# Altium PCB FPGA_Rack_v1_0.PcbDoc (part 1 of 5)
Units mil, origin at the board's own origin, x right, y up, seen from the top; angles counter-clockwise.
Board outline 6299.21 x 3937.01 mil, 8 copper layers (Top Layer, Top, Internal Plane 2, Vcc 3.3V, Internal Plane 1, Gnd, Mid-Layer 1, SIG1, Mid-Layer 2, SIG3, Mid-Layer 3, SIG2, Mid-Layer 4, SIG4, Bottom Layer, Bottom), stack 74.2 mil thick; 215 components, 379 nets, 1713 pads, 1076 vias.
Unrouted connection lines stored in the file: 1.
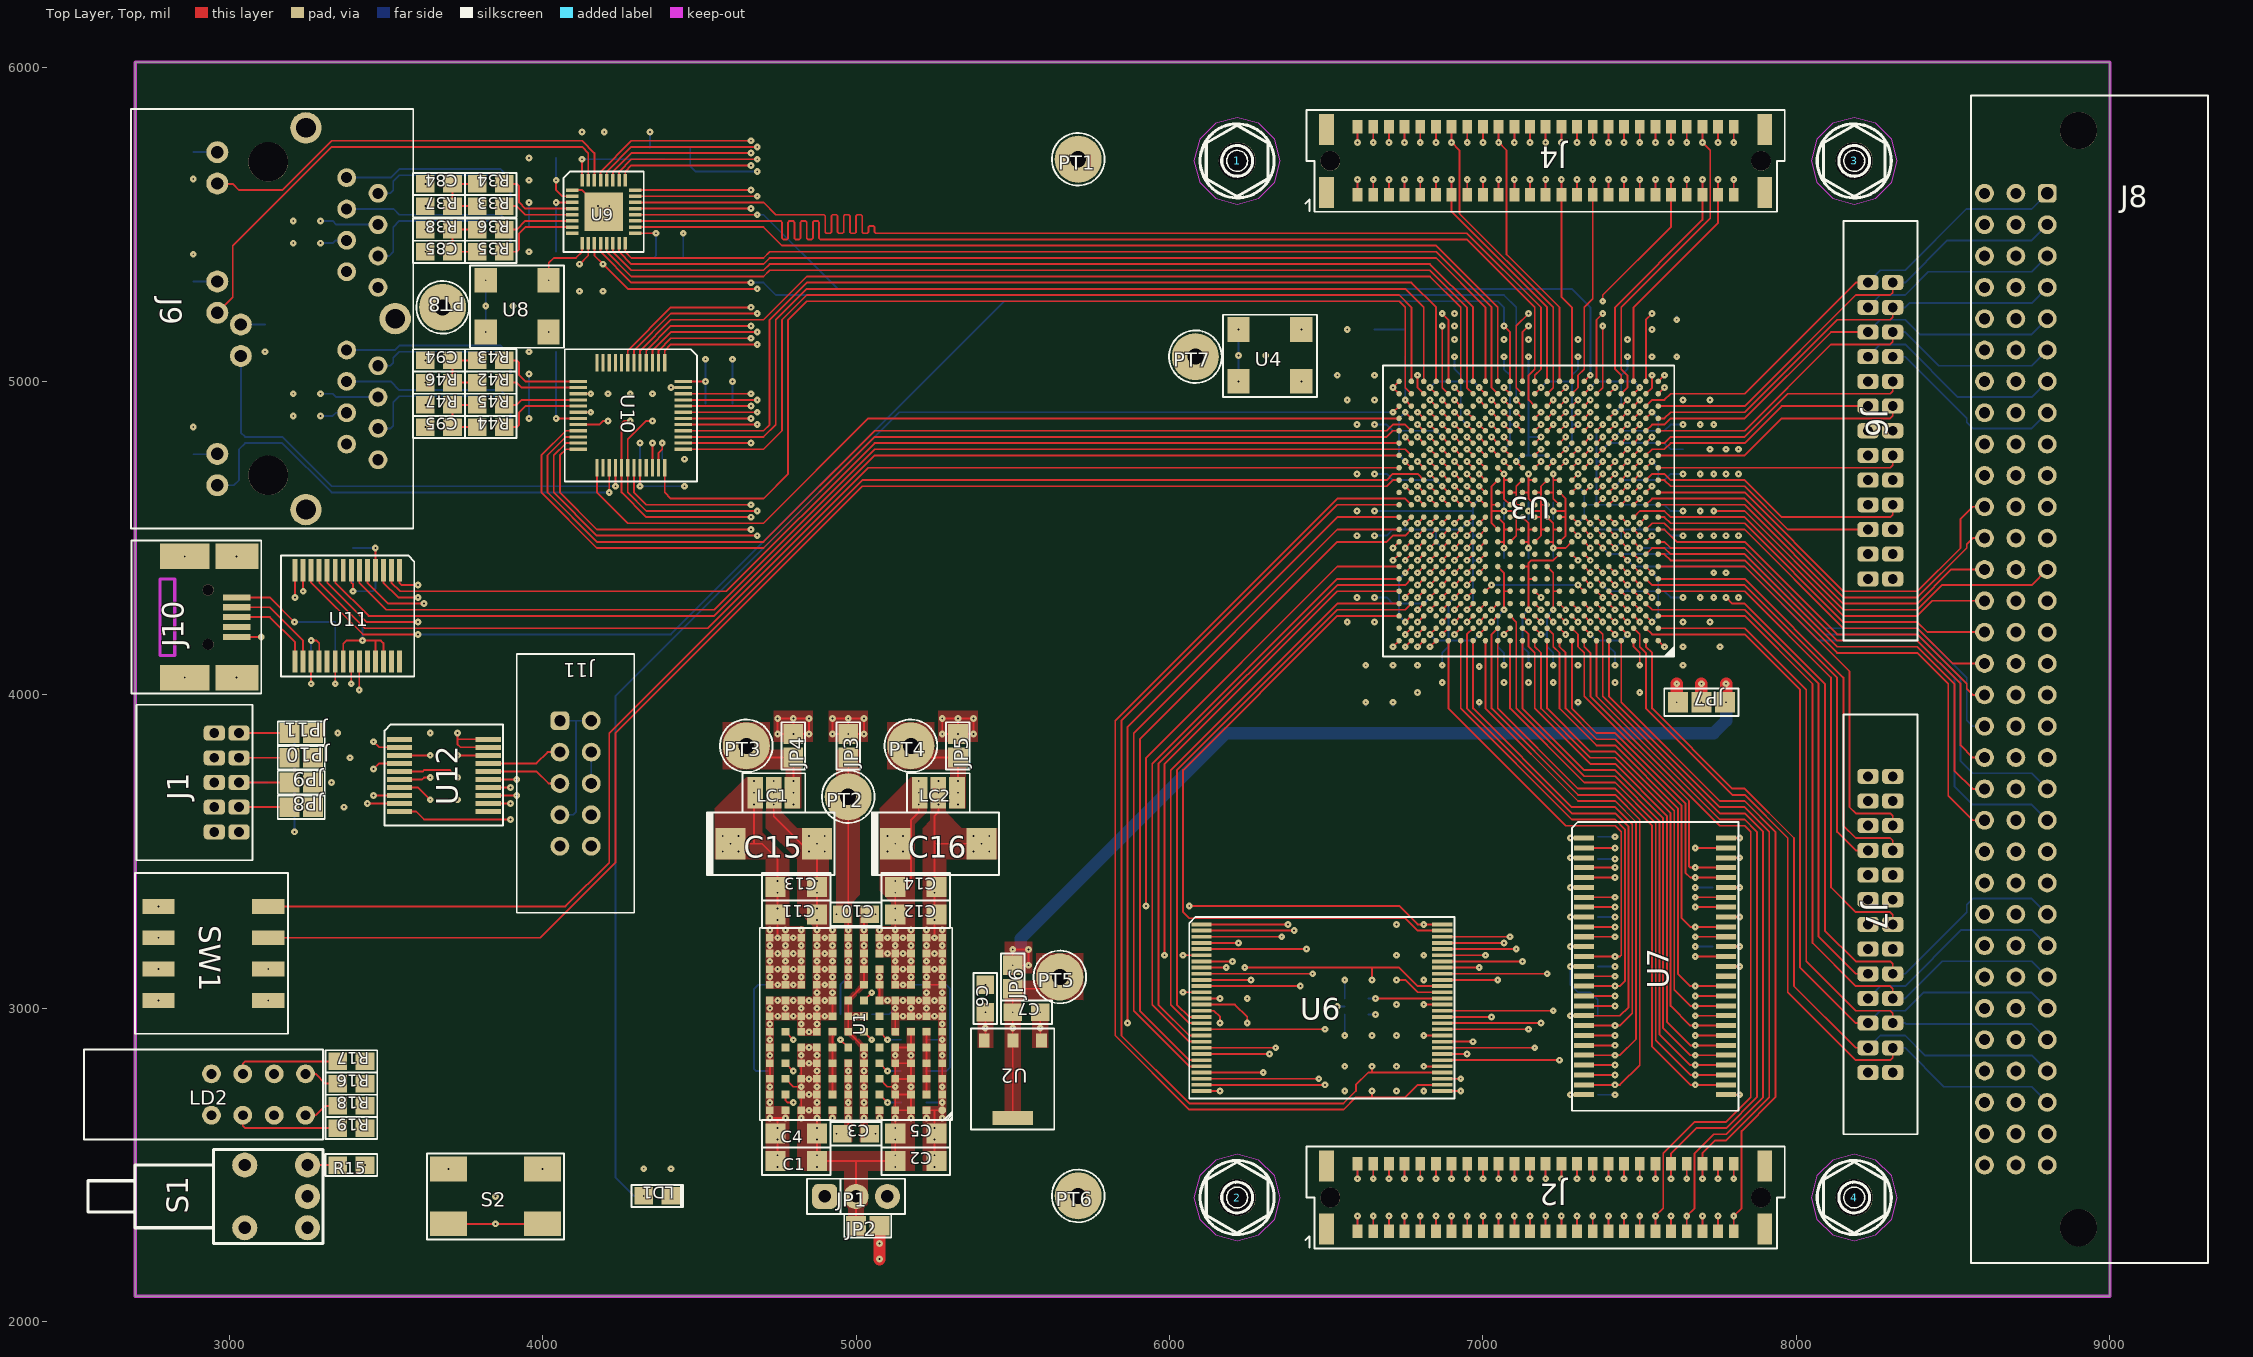
[diagram p0: Top Layer, Top view]
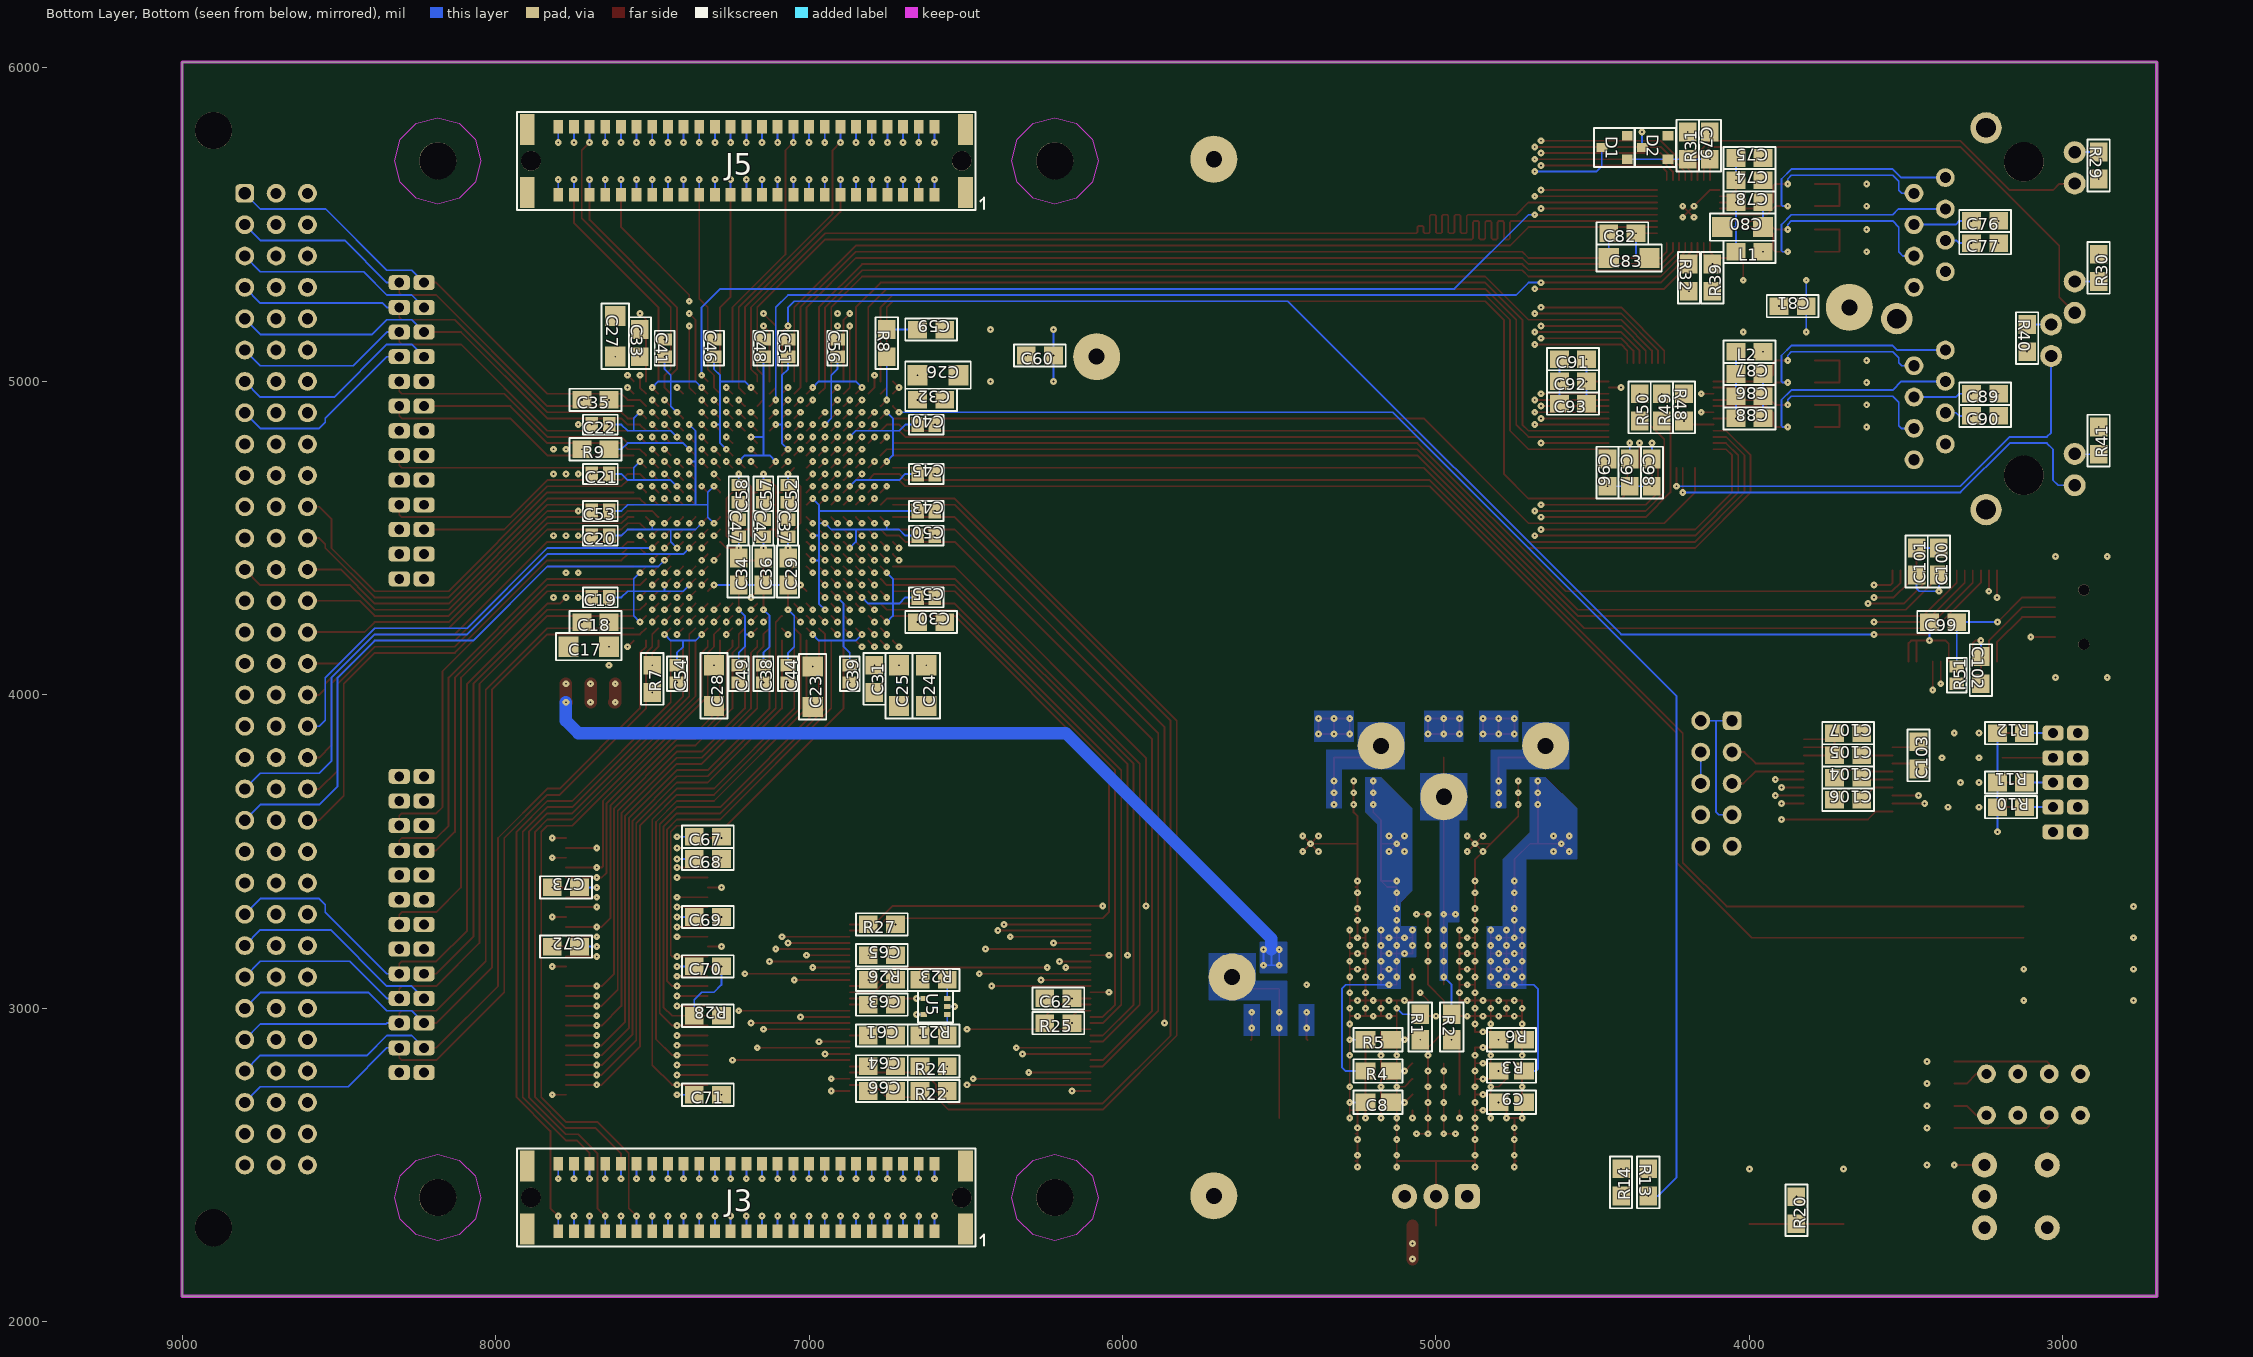
[diagram p1: Bottom Layer, Bottom view, seen from below]
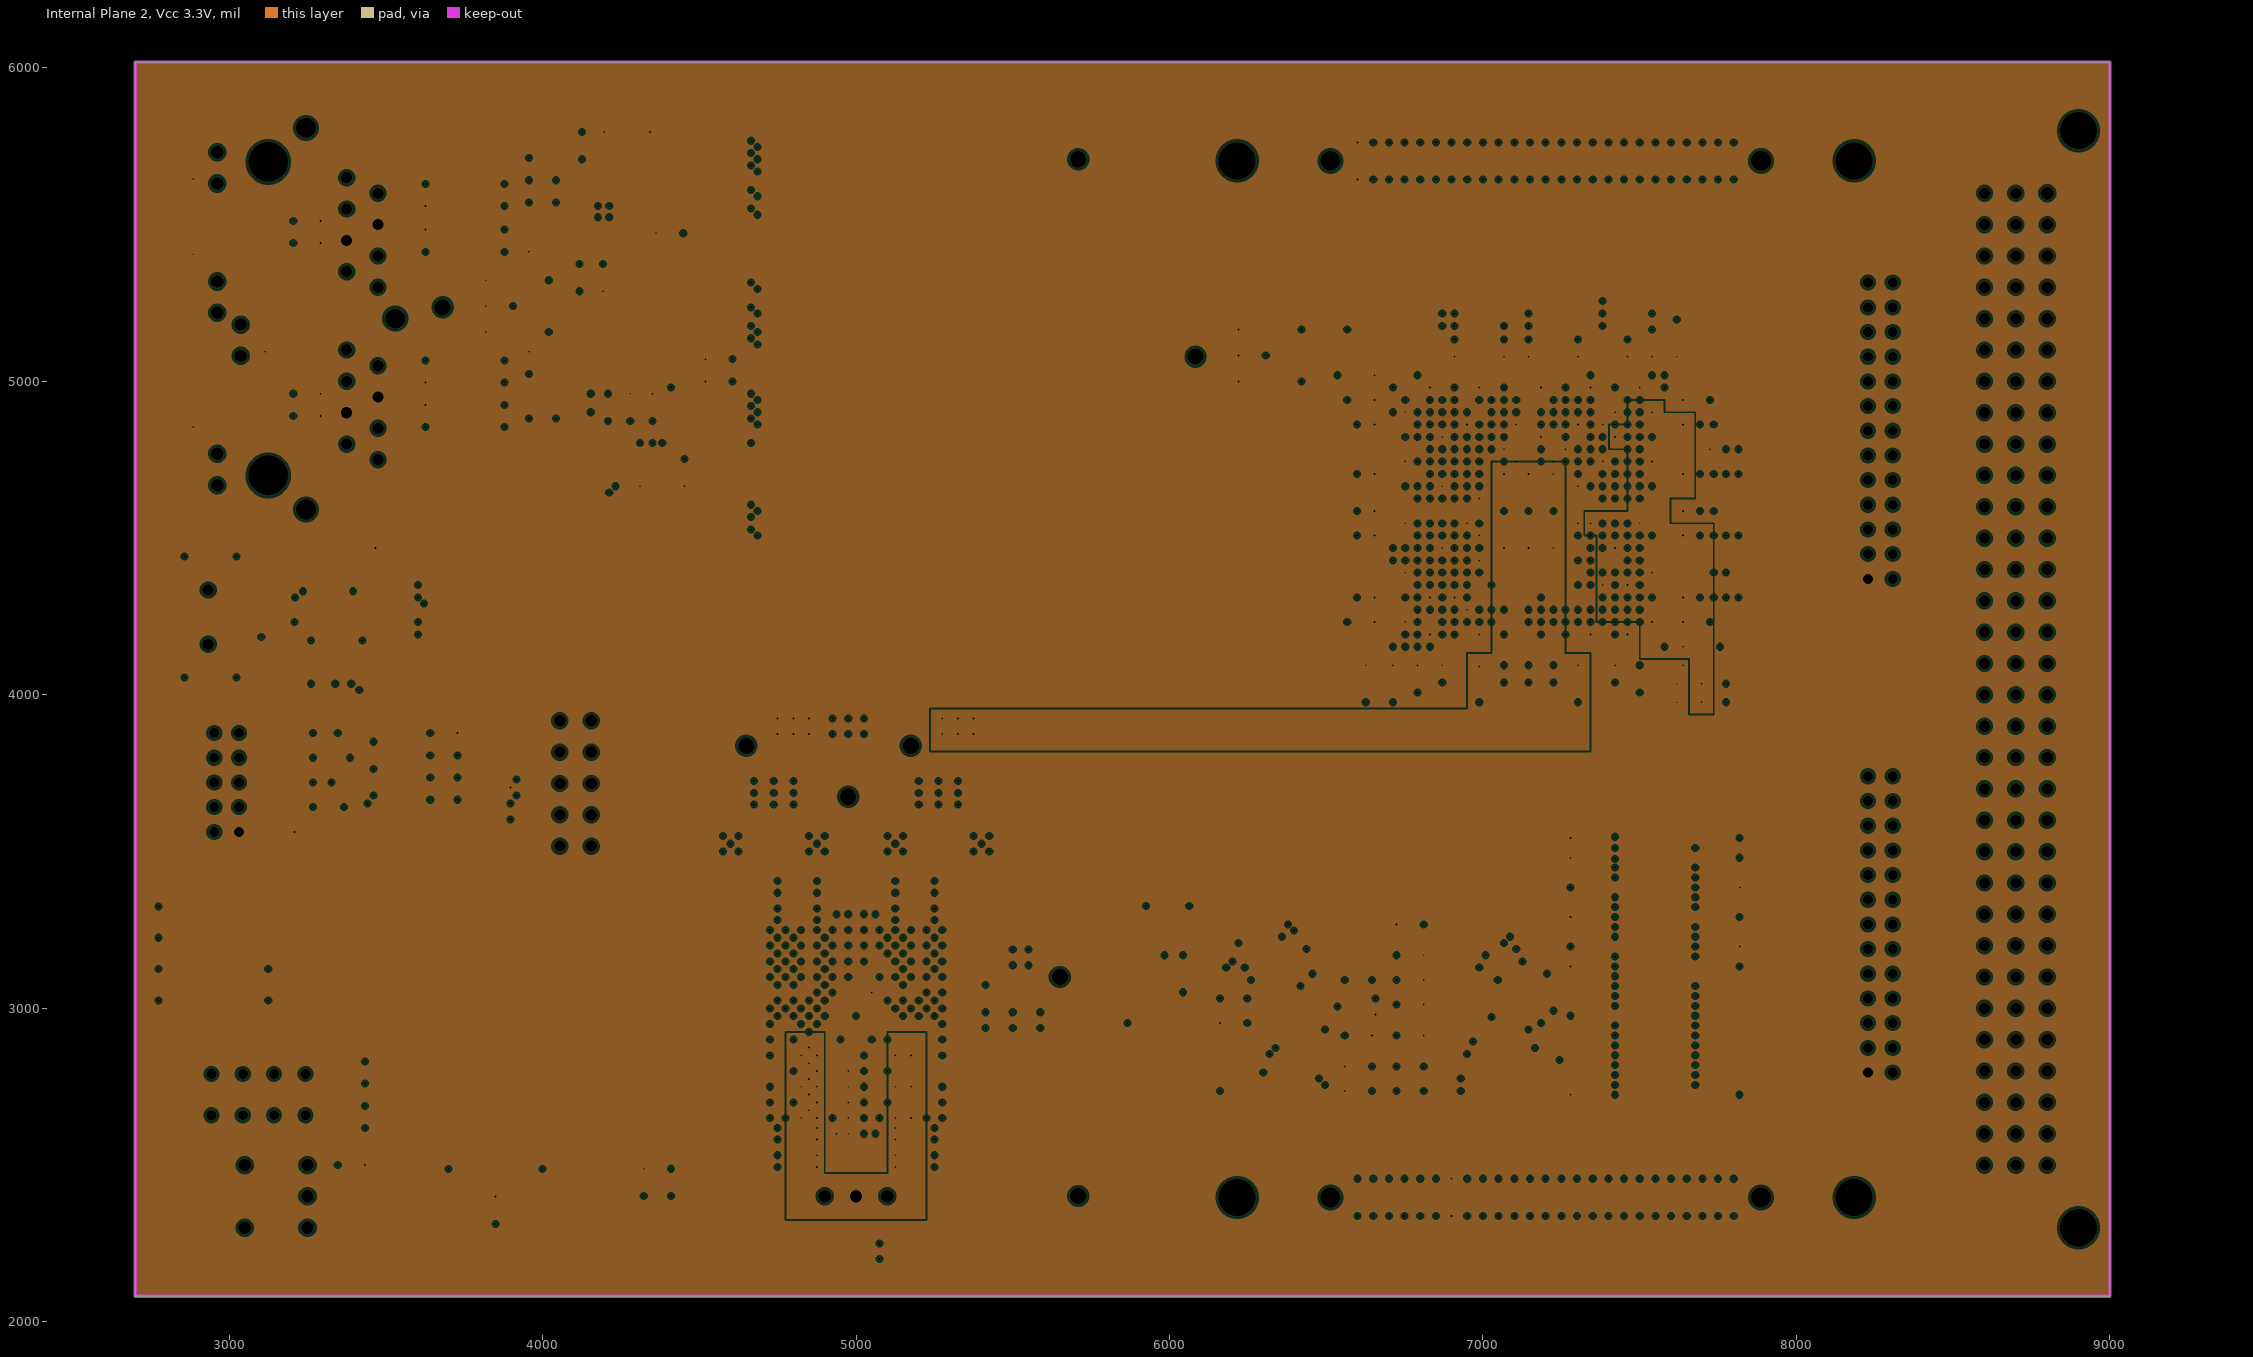
[diagram p2: Internal Plane 2, Vcc 3.3V, clearances drawn from the general rule]
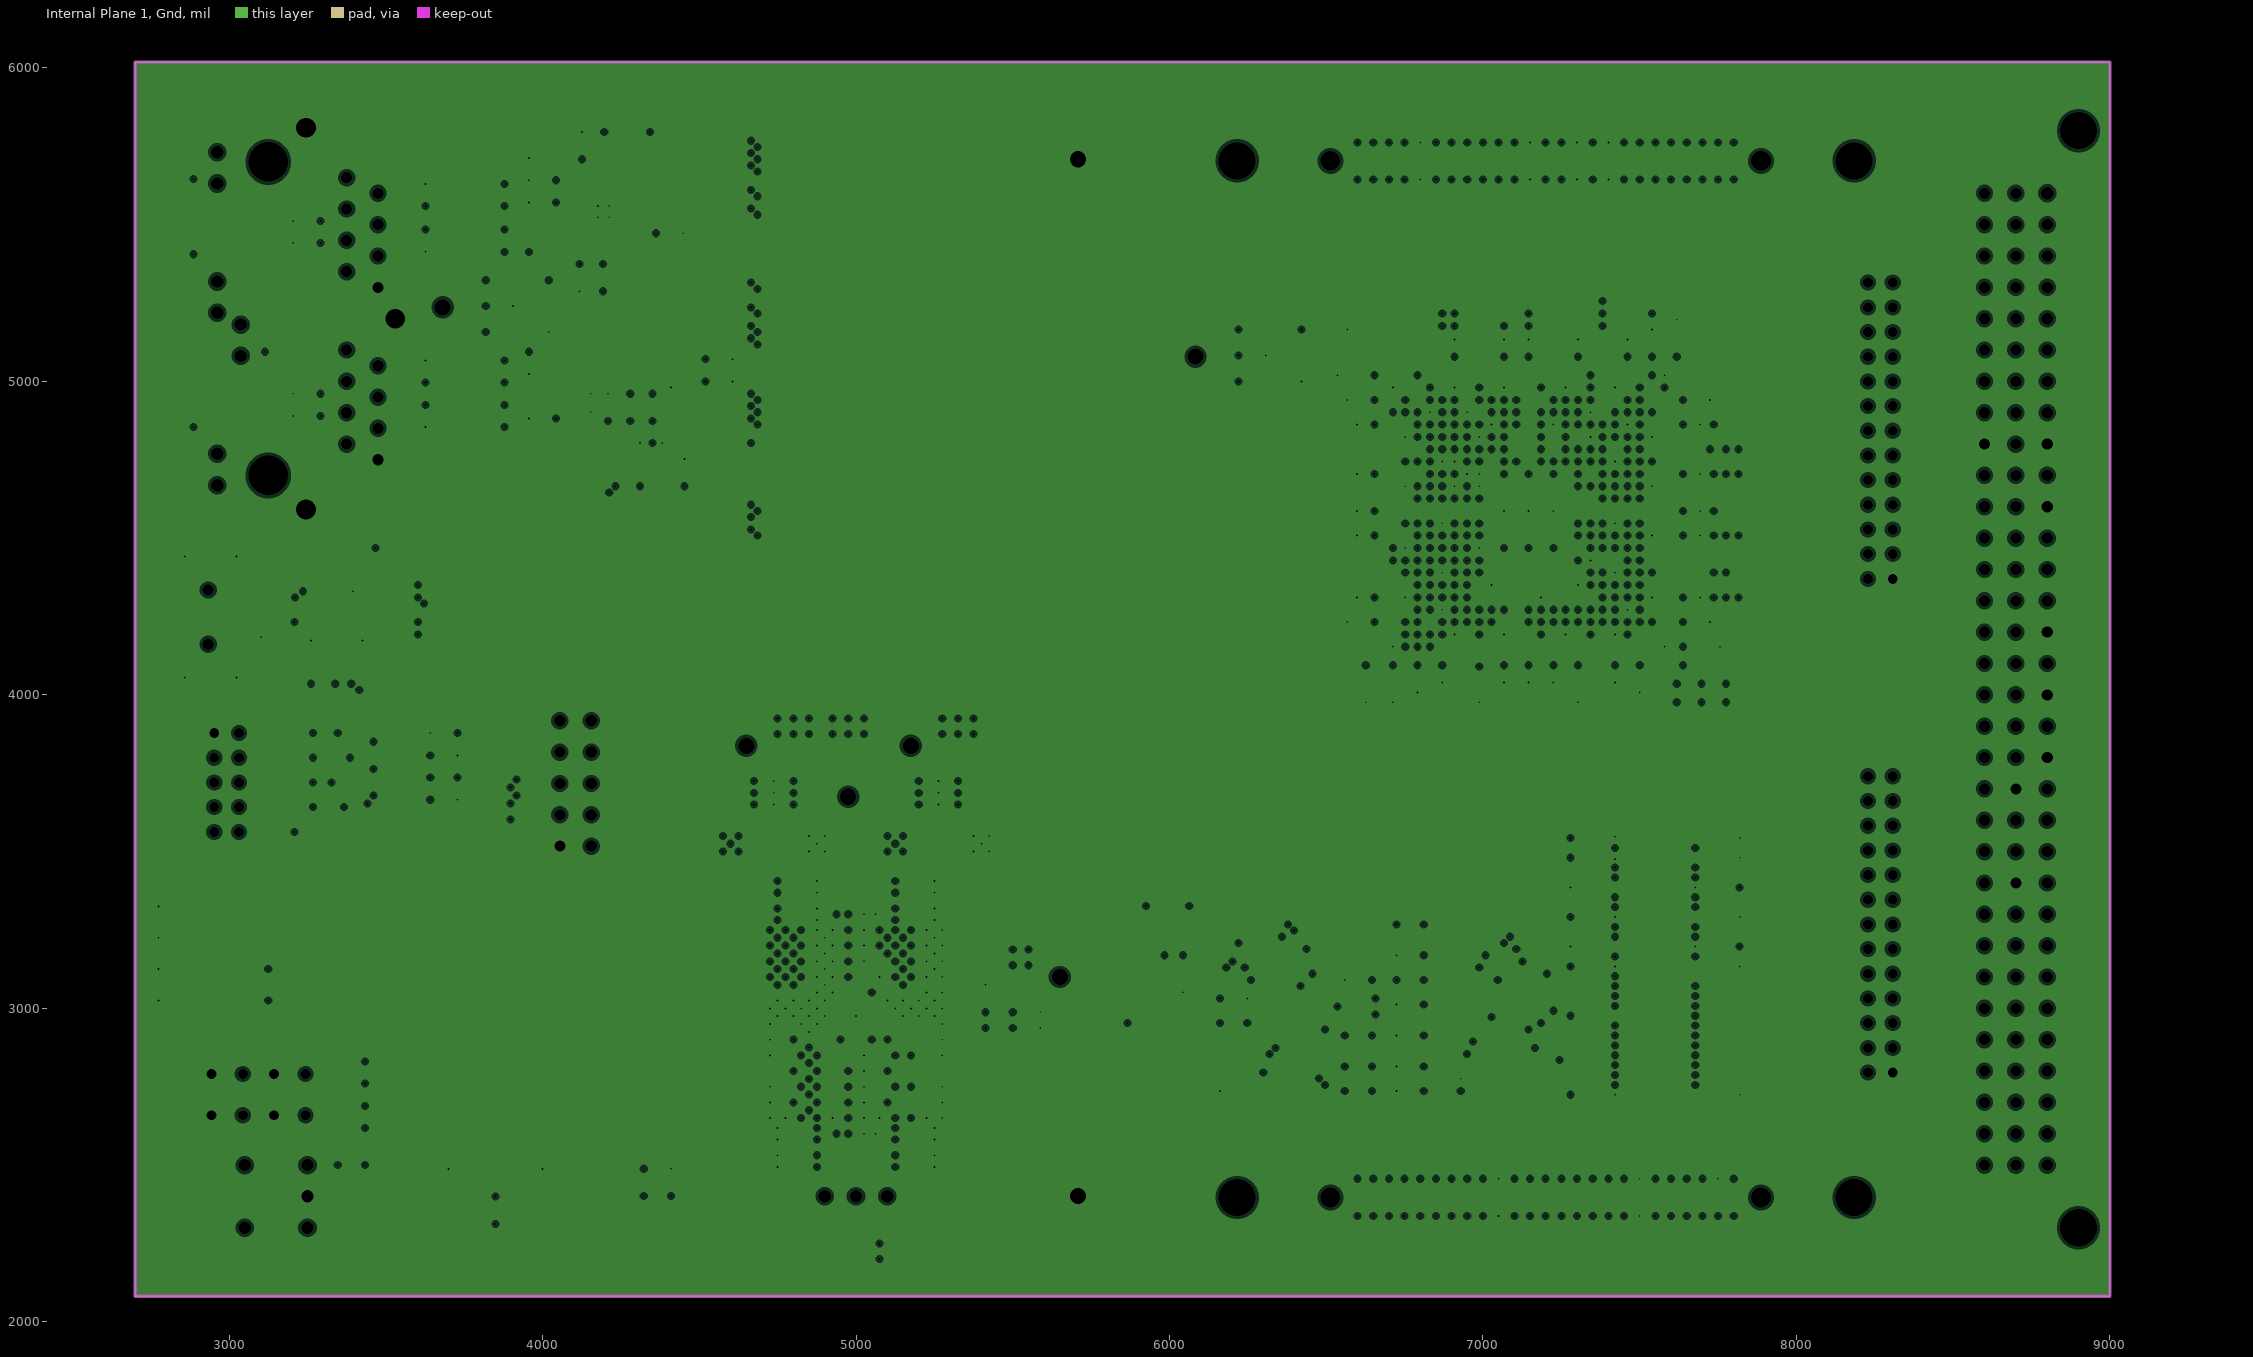
[diagram p3: Internal Plane 1, Gnd, clearances drawn from the general rule]
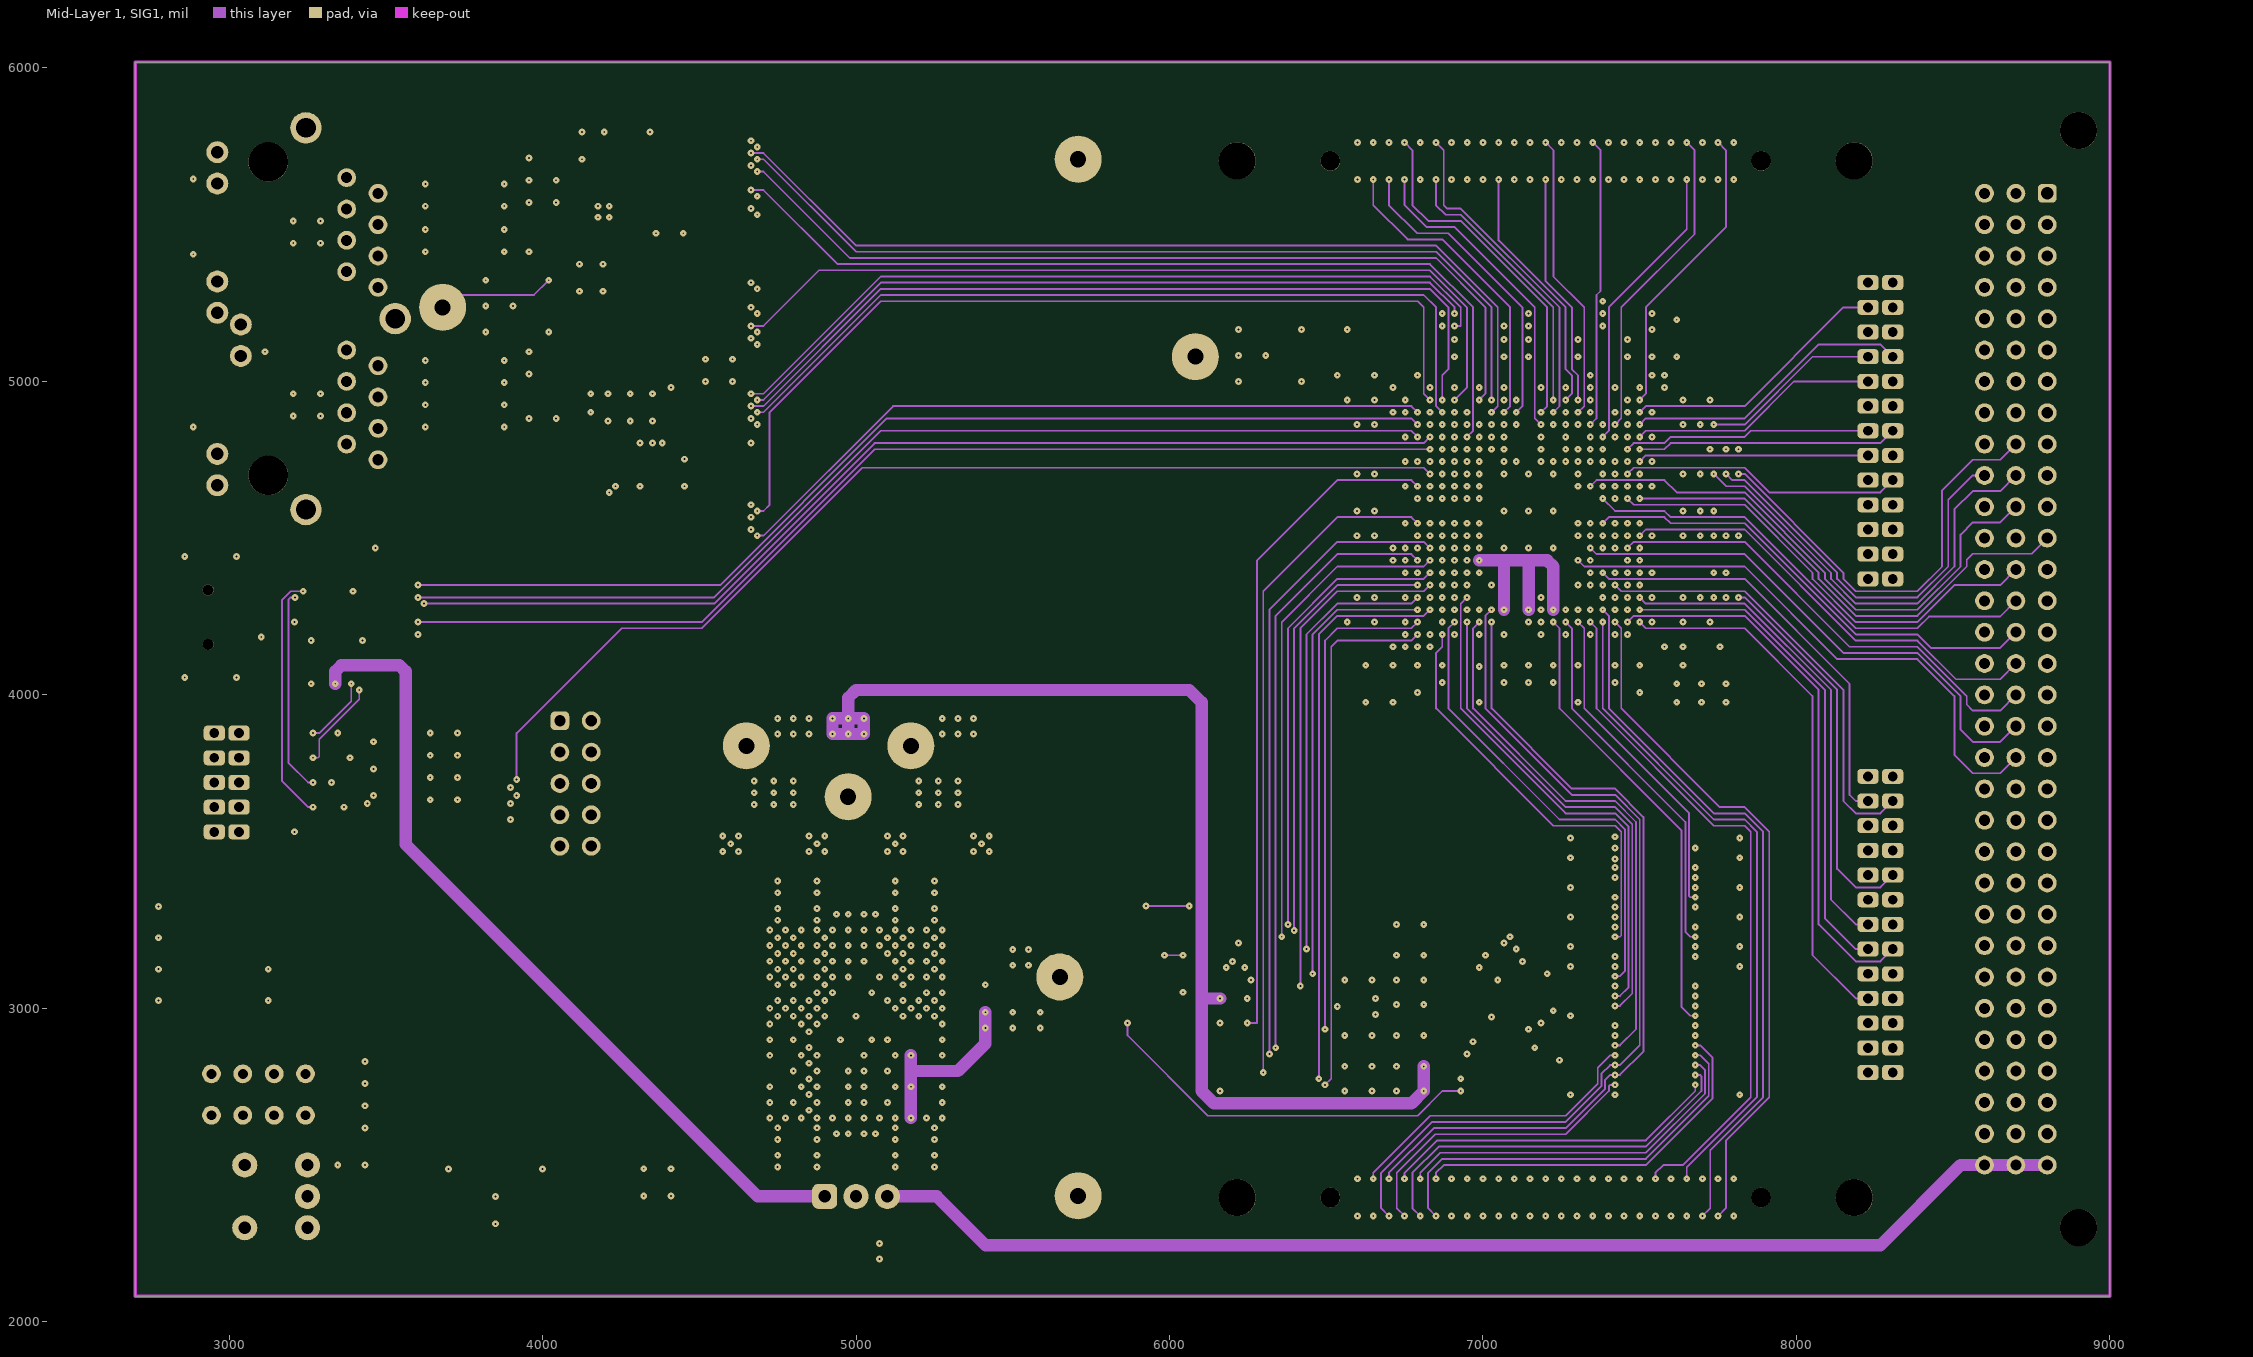
[diagram p4: Mid-Layer 1, SIG1]
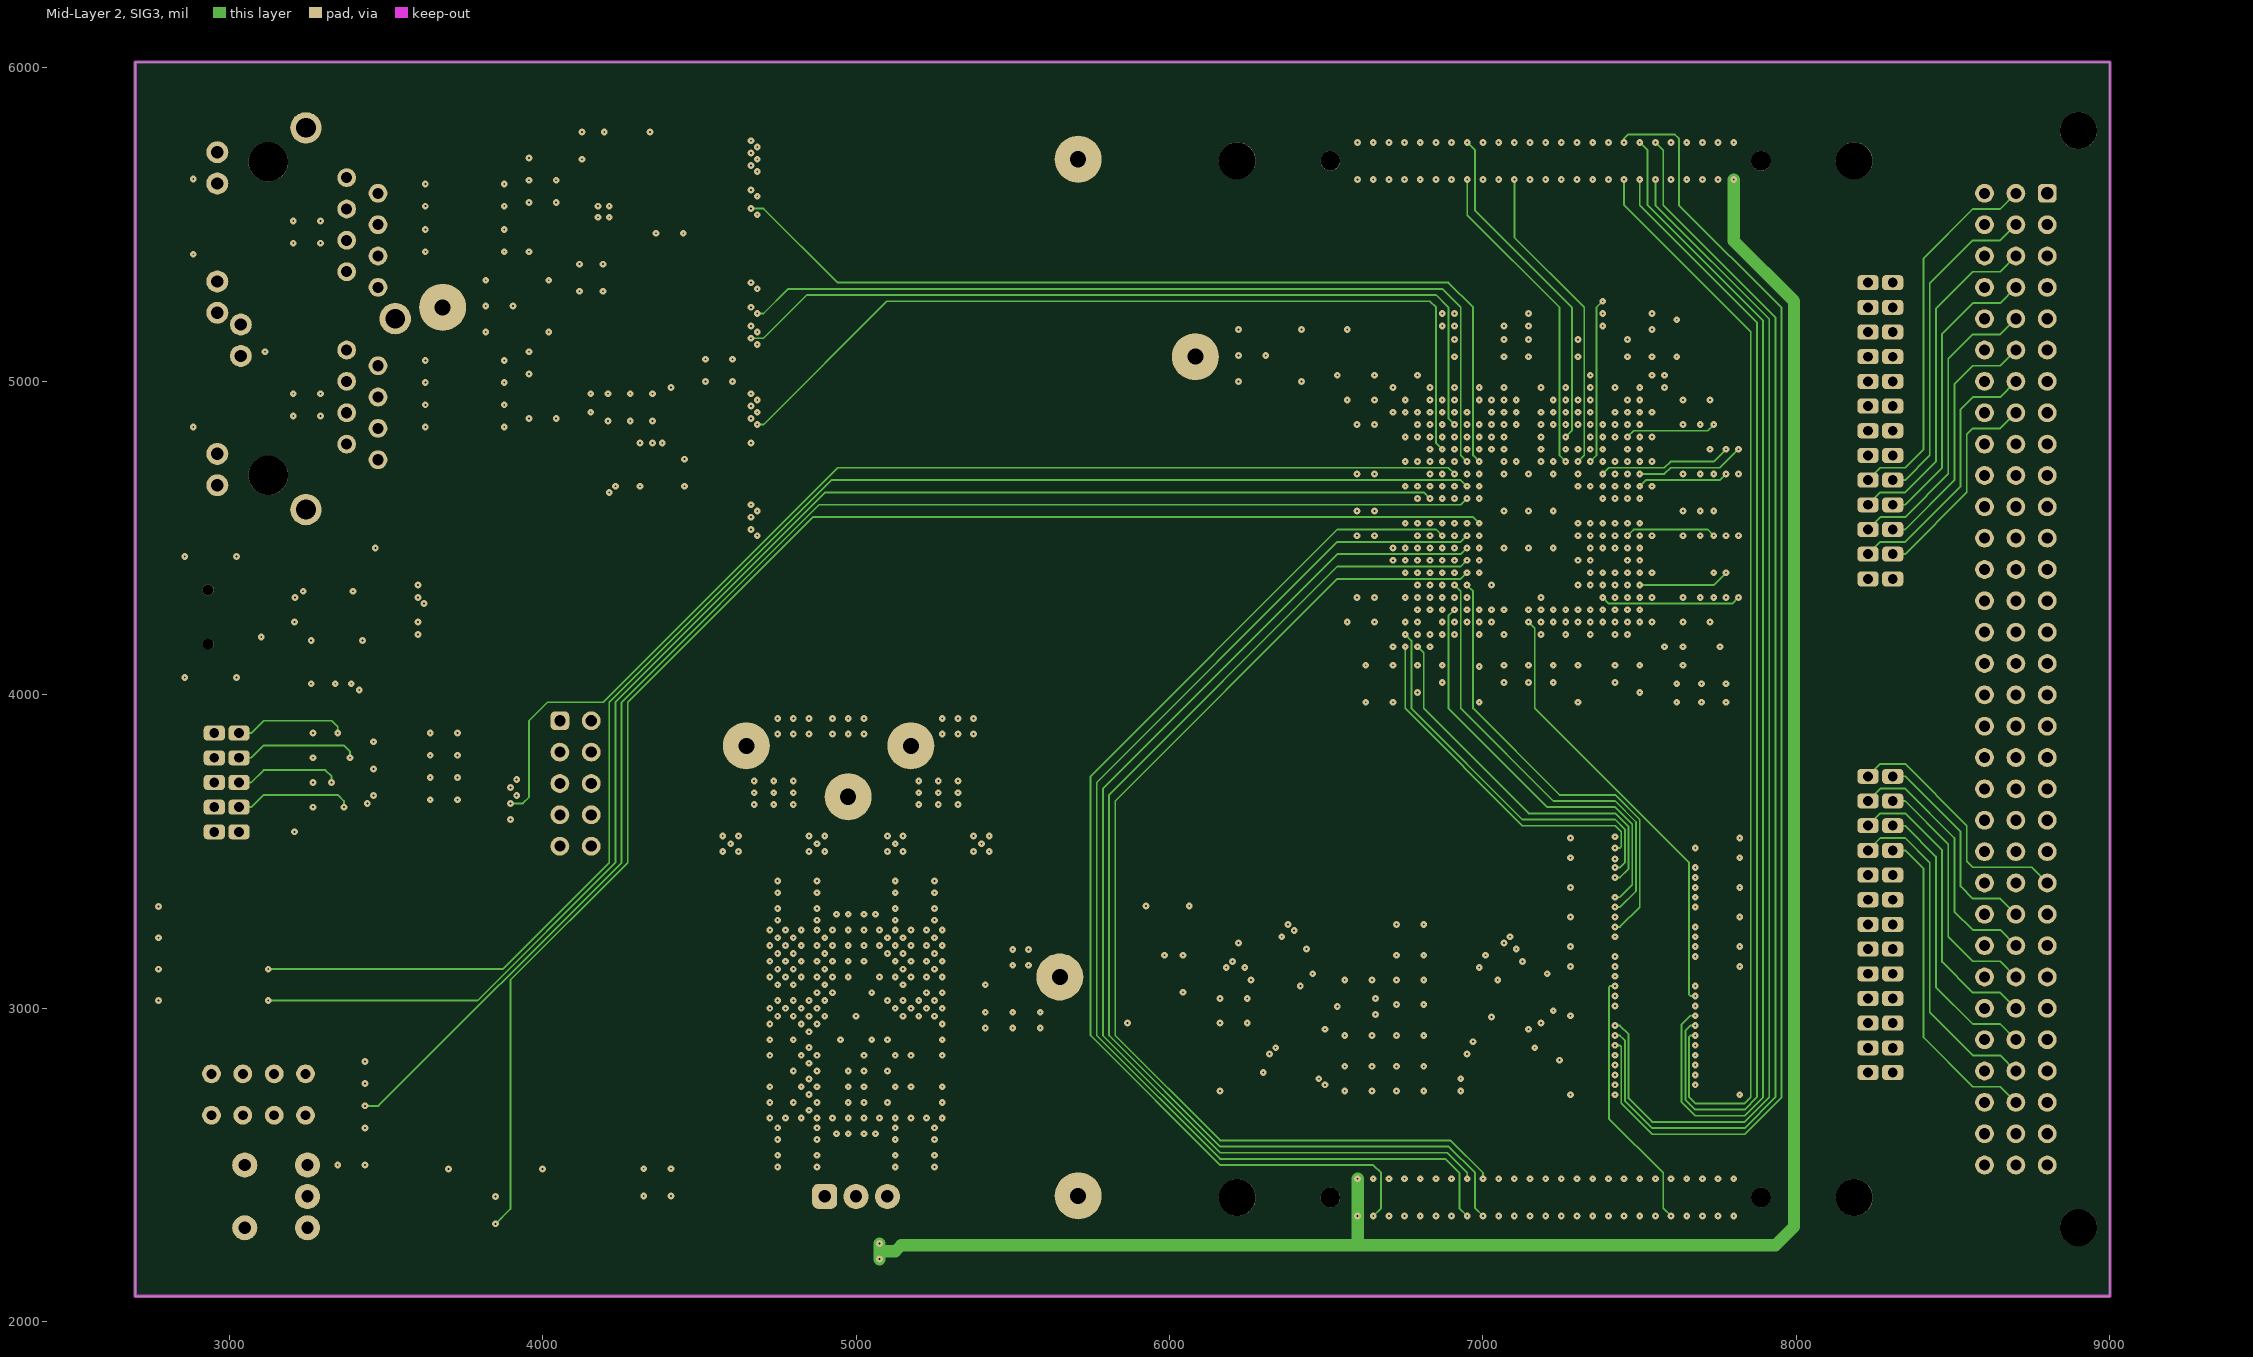
[diagram p5: Mid-Layer 2, SIG3]
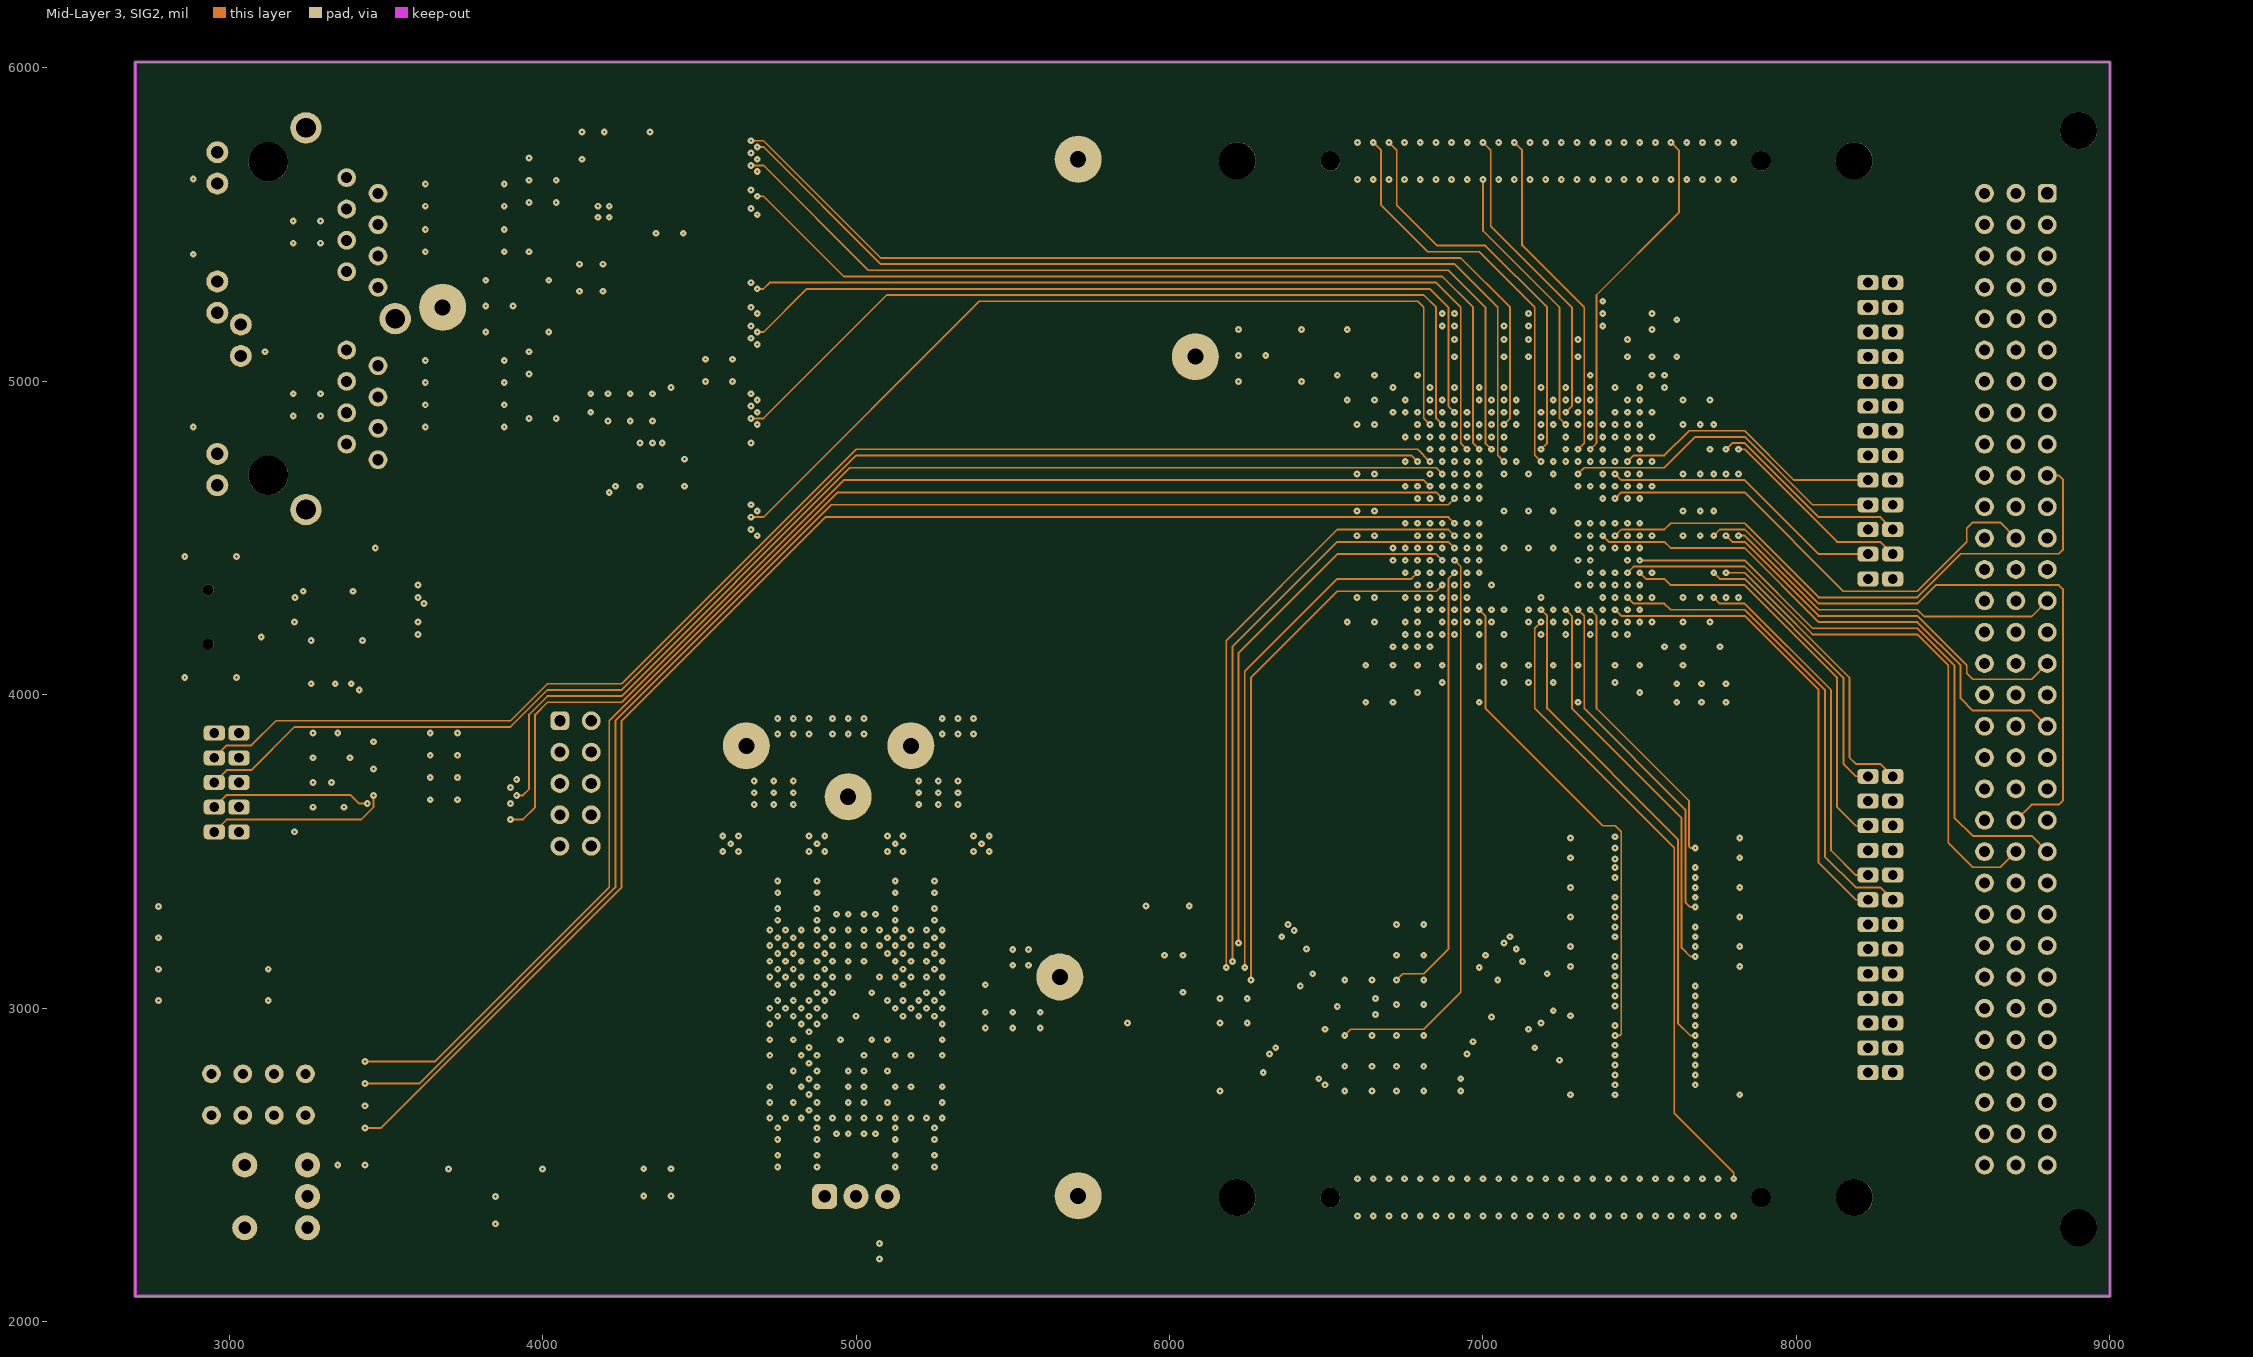
[diagram p6: Mid-Layer 3, SIG2]
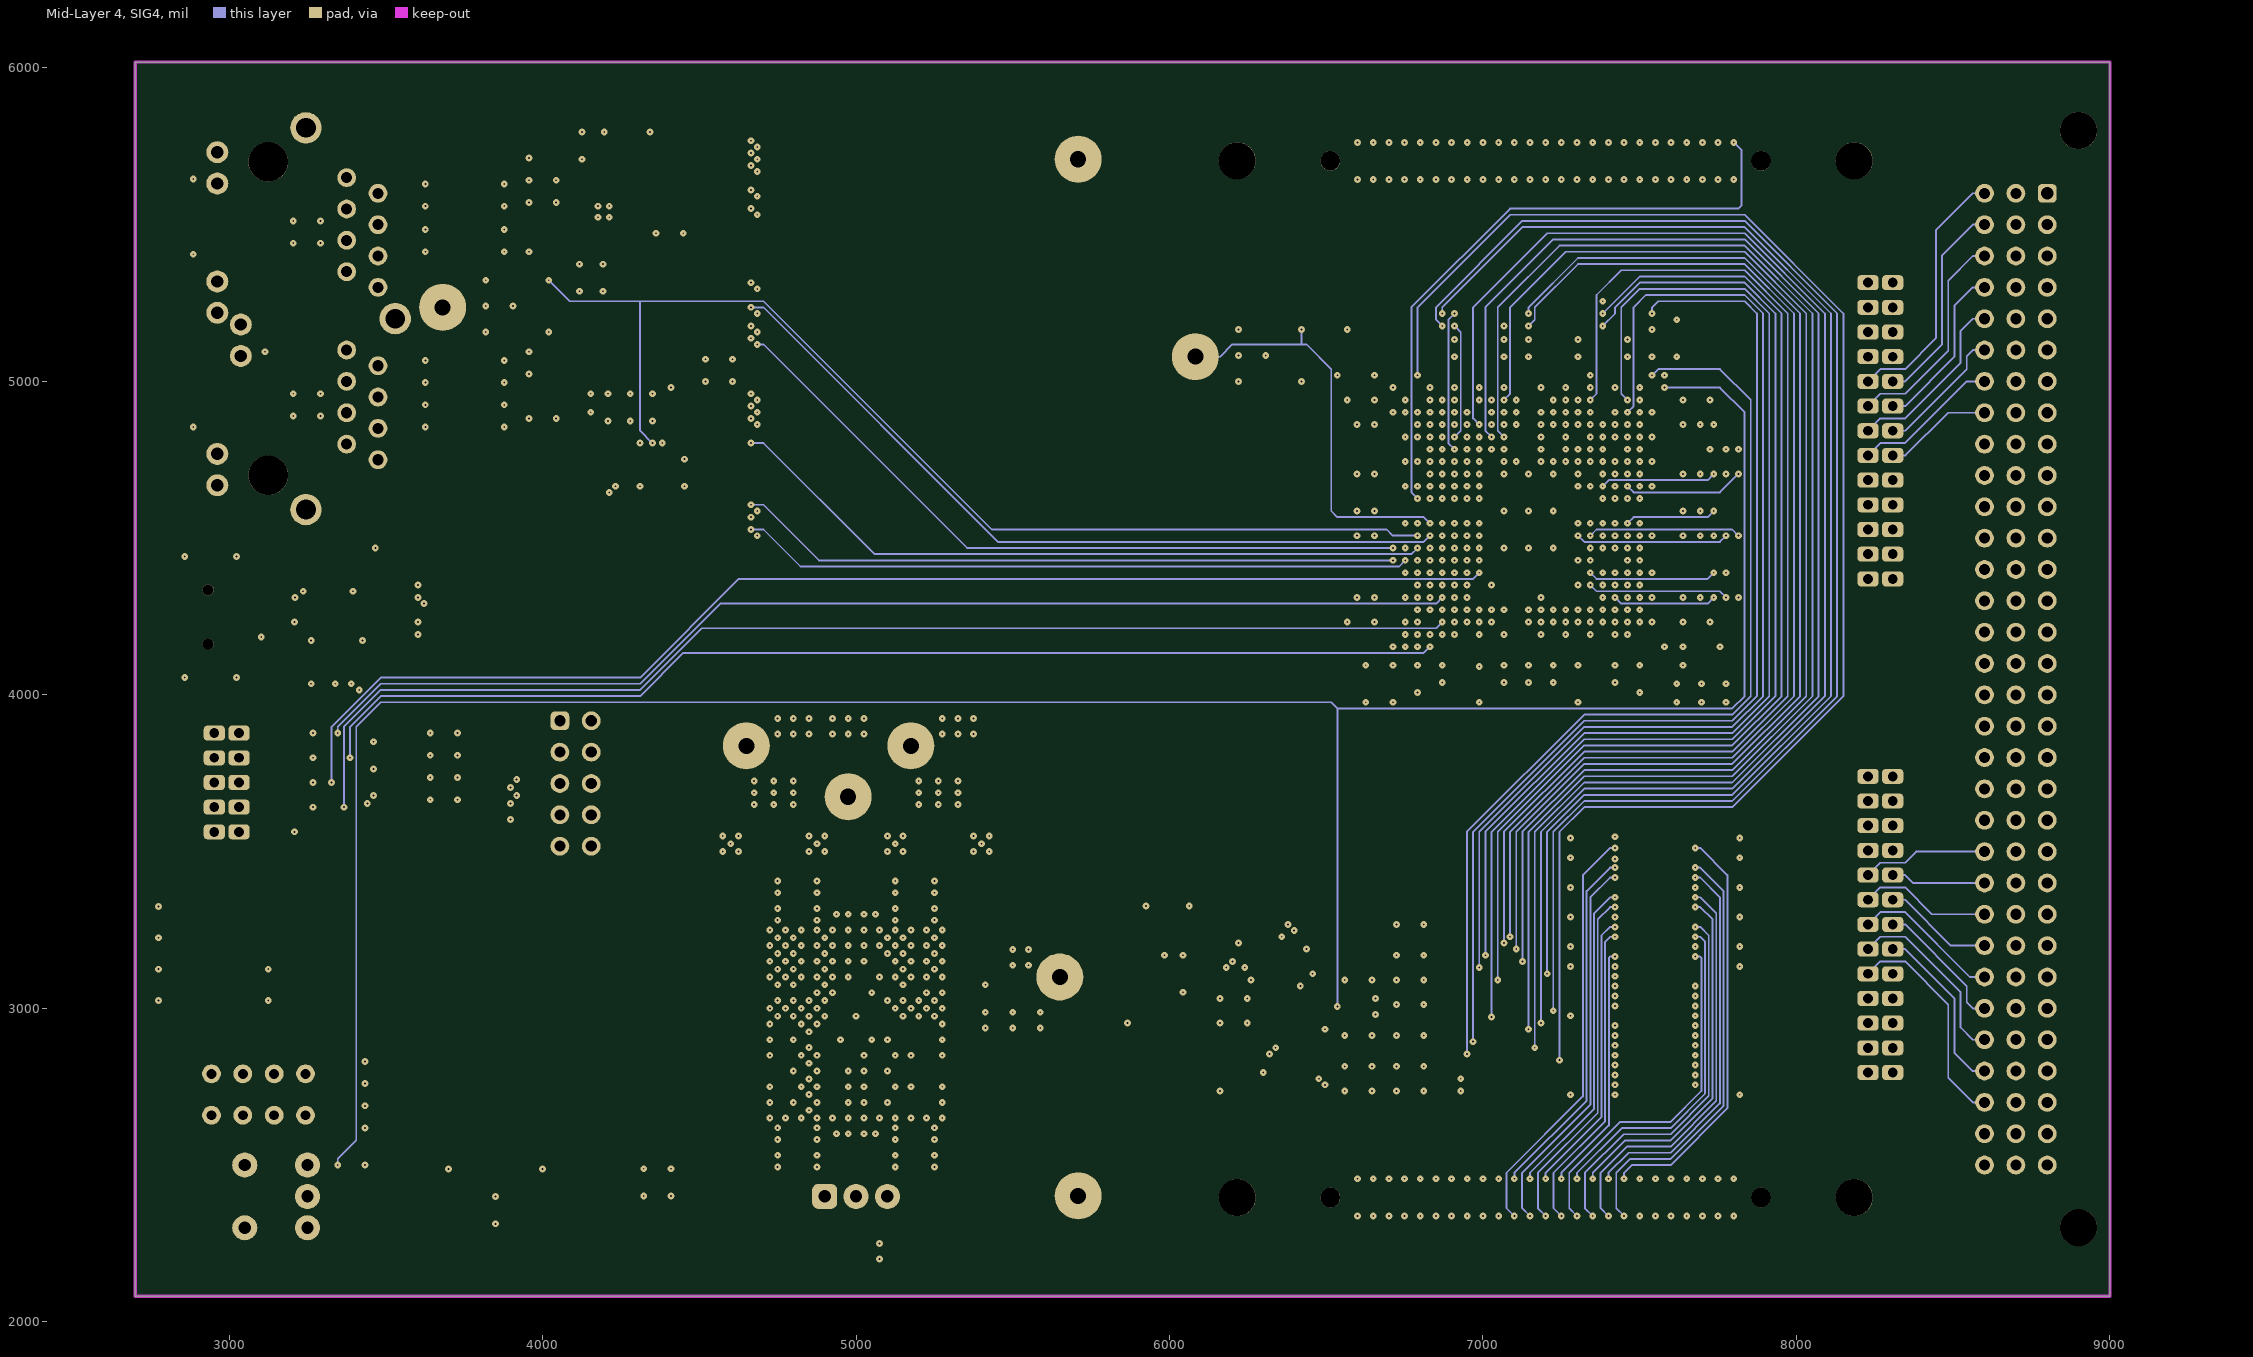
[diagram p7: Mid-Layer 4, SIG4]

## Layer stack, top to bottom
Top Solder, Top Mask: solder mask 0.4, Solder Resist, Dk 3.5
Top Layer, Top: signal copper 1.4
Dielectric 1: dielectric 12.6, FR-4, Dk 4.8
Internal Plane 2, Vcc 3.3V: plane copper 1.4, net 3.3V
Internal Plane 1, Gnd: plane copper 1.4, net GND
Mid-Layer 1, SIG1: signal copper 1.4
Dielectric2: dielectric 12.6, FR-4, Dk 4.8
Mid-Layer 2, SIG3: signal copper 1.4
Dielectric3: dielectric 12.6, FR-4, Dk 4.8
Mid-Layer 3, SIG2: signal copper 1.4
Dielectric6: dielectric 12.6, FR-4, Dk 4.8
Mid-Layer 4, SIG4: signal copper 1.4
Dielectric7: dielectric 12.6, FR-4, Dk 4.8
Bottom Layer, Bottom: signal copper 1.4
Bottom Solder, Bot Mask: solder mask 0.4, Solder Resist, Dk 3.5

## Board outline
2700.79,6018.5 2700.79,2081.5 9000,2081.5 9000,6018.5

## Design rules (kind name [scope] priority, off if disabled: settings)
Clearance [All] p1: gap=10 ignorepadtopadclearanceinfootprint=FALSE except(0: Arc-Hole Track-Hole SMDPad-Hole THPad-Hole Via-Hole Fill-Hole Poly-Hole Region-Hole Text-Hole; 5.91: Arc-Arc Arc-Track Arc-THPad Arc-Via Track-Track Track-THPad Track-Via THPad-THPad THPad-Via Via-Via)
PlaneClearance [All] p1: clearance=10
PlaneConnect PadTherm_hole0.9 [InPadClass('hole0.9')] p1: planeconnectstyle=NoConnect reliefexpansion=20 reliefentries=4 reliefconductorwidth=10 reliefairgap=10
PlaneConnect PadTherm_hole1.6 [InPadClass('hole1.6')] p2: planeconnectstyle=NoConnect reliefexpansion=20 reliefentries=4 reliefconductorwidth=10 reliefairgap=10
PlaneConnect PadTherm_hole3.0 [InPadClass('hole3.0')] p3: planeconnectstyle=NoConnect reliefexpansion=20 reliefentries=4 reliefconductorwidth=10 reliefairgap=10
PlaneConnect PadTherm_hole3.2 [InPadClass('hole3.2')] p4: planeconnectstyle=NoConnect reliefexpansion=20 reliefentries=4 reliefconductorwidth=10 reliefairgap=10
PlaneConnect PadTherm_P:SX50Y100DOT [InPadClass('P:SX50Y100DOT')] p5: planeconnectstyle=Relief reliefexpansion=0 reliefentries=4 reliefconductorwidth=0 reliefairgap=0
PlaneConnect PadTherm_P:SX60Y56D0T [InPadClass('P:SX60Y56D0T')] p6: planeconnectstyle=Relief reliefexpansion=0 reliefentries=4 reliefconductorwidth=0 reliefairgap=0
PlaneConnect PadTherm_P:SX63Y63D0T [InPadClass('P:SX63Y63D0T')] p7: planeconnectstyle=Relief reliefexpansion=0 reliefentries=4 reliefconductorwidth=0 reliefairgap=0
PlaneConnect PadTherm_P:SX64Y64D0T [InPadClass('P:SX64Y64D0T')] p8: planeconnectstyle=Relief reliefexpansion=0 reliefentries=4 reliefconductorwidth=0 reliefairgap=0
PlaneConnect PadTherm_P:SX96Y102D0T [InPadClass('P:SX96Y102D0T')] p9: planeconnectstyle=Relief reliefexpansion=0 reliefentries=4 reliefconductorwidth=0 reliefairgap=0
PlaneConnect PadTherm_SMD0.25X1.4 [InPadClass('SMD0.25X1.4')] p10: planeconnectstyle=Relief reliefexpansion=0 reliefentries=4 reliefconductorwidth=0 reliefairgap=0
PlaneConnect PadTherm_SMD0.28X1.0 [InPadClass('SMD0.28X1.0')] p11: planeconnectstyle=Relief reliefexpansion=0 reliefentries=4 reliefconductorwidth=0 reliefairgap=0
PlaneConnect PadTherm_SMD0.45 [InPadClass('SMD0.45')] p12: planeconnectstyle=NoConnect reliefexpansion=20 reliefentries=4 reliefconductorwidth=10 reliefairgap=10
PlaneConnect PadTherm_SMD0.5X0.4 [InPadClass('SMD0.5X0.4')] p13: planeconnectstyle=Relief reliefexpansion=0 reliefentries=4 reliefconductorwidth=0 reliefairgap=0
PlaneConnect PadTherm_SMD0.63MM [InPadClass('SMD0.63MM')] p14: planeconnectstyle=Relief reliefexpansion=0 reliefentries=4 reliefconductorwidth=0 reliefairgap=0
PlaneConnect PadTherm_SMD0.63X0.63 [InPadClass('SMD0.63X0.63')] p15: planeconnectstyle=Relief reliefexpansion=0 reliefentries=4 reliefconductorwidth=0 reliefairgap=0
PlaneConnect PadTherm_SMD1.1X0.8 [InPadClass('SMD1.1X0.8')] p16: planeconnectstyle=Relief reliefexpansion=0 reliefentries=4 reliefconductorwidth=0 reliefairgap=0
PlaneConnect PadTherm_SMD1.2x1.0 [InPadClass('SMD1.2x1.0')] p17: planeconnectstyle=Relief reliefexpansion=0 reliefentries=4 reliefconductorwidth=0 reliefairgap=0
PlaneConnect PadTherm_SMD1.6x1.4 [InPadClass('SMD1.6x1.4')] p18: planeconnectstyle=Relief reliefexpansion=0 reliefentries=4 reliefconductorwidth=0 reliefairgap=0
PlaneConnect PadTherm_SMD1.8x0.4 [InPadClass('SMD1.8x0.4')] p19: planeconnectstyle=Relief reliefexpansion=0 reliefentries=4 reliefconductorwidth=0 reliefairgap=0
PlaneConnect PadTherm_SMD130X45 [InPadClass('SMD130X45')] p20: planeconnectstyle=Relief reliefexpansion=0 reliefentries=4 reliefconductorwidth=0 reliefairgap=0
PlaneConnect PadTherm_SMD2.0x1.8 [InPadClass('SMD2.0x1.8')] p21: planeconnectstyle=Relief reliefexpansion=0 reliefentries=4 reliefconductorwidth=0 reliefairgap=0
PlaneConnect PadTherm_SMD2.25X0.5 [InPadClass('SMD2.25X0.5')] p22: planeconnectstyle=Relief reliefexpansion=0 reliefentries=4 reliefconductorwidth=0 reliefairgap=0
PlaneConnect PadTherm_SMD2.5X1.2 [InPadClass('SMD2.5X1.2')] p23: planeconnectstyle=Relief reliefexpansion=0 reliefentries=4 reliefconductorwidth=0 reliefairgap=0
PlaneConnect PadTherm_SMD2.6x1.2 [InPadClass('SMD2.6x1.2')] p24: planeconnectstyle=Relief reliefexpansion=0 reliefentries=4 reliefconductorwidth=0 reliefairgap=0
PlaneConnect PadTherm_SMD3.0X2.0 [InPadClass('SMD3.0X2.0')] p25: planeconnectstyle=Relief reliefexpansion=0 reliefentries=4 reliefconductorwidth=0 reliefairgap=0
PlaneConnect PadTherm_SMD3.1x3.1 [InPadClass('SMD3.1x3.1')] p26: planeconnectstyle=Relief reliefexpansion=0 reliefentries=4 reliefconductorwidth=0 reliefairgap=0
PlaneConnect PadTherm_SMD3.5X2.05 [InPadClass('SMD3.5X2.05')] p27: planeconnectstyle=Relief reliefexpansion=0 reliefentries=4 reliefconductorwidth=0 reliefairgap=0
PlaneConnect PadTherm_SMD35X30 [InPadClass('SMD35X30')] p28: planeconnectstyle=Relief reliefexpansion=0 reliefentries=4 reliefconductorwidth=0 reliefairgap=0
PlaneConnect PadTherm_SMD45X35 [InPadClass('SMD45X35')] p29: planeconnectstyle=Relief reliefexpansion=0 reliefentries=4 reliefconductorwidth=0 reliefairgap=0
PlaneConnect PadTherm_SMD4X2.05 [InPadClass('SMD4X2.05')] p30: planeconnectstyle=Relief reliefexpansion=0 reliefentries=4 reliefconductorwidth=0 reliefairgap=0
PlaneConnect PadTherm_SMD64X12 [InPadClass('SMD64X12')] p31: planeconnectstyle=Relief reliefexpansion=0 reliefentries=4 reliefconductorwidth=0 reliefairgap=0
PlaneConnect PadTherm_SMD64X16 [InPadClass('SMD64X16')] p32: planeconnectstyle=Relief reliefexpansion=0 reliefentries=4 reliefconductorwidth=0 reliefairgap=0
PlaneConnect PadTherm_SMD80X16 [InPadClass('SMD80X16')] p33: planeconnectstyle=Relief reliefexpansion=0 reliefentries=4 reliefconductorwidth=0 reliefairgap=0
PlaneConnect PadTherm_-TC100-1.6 [InPadClass('-TC100-1.6')] p34: planeconnectstyle=Relief reliefexpansion=16 reliefentries=4 reliefconductorwidth=25 reliefairgap=15
PlaneConnect PadTherm_-TC150-1.3 [InPadClass('-TC150-1.3')] p35: planeconnectstyle=Relief reliefexpansion=16.91 reliefentries=4 reliefconductorwidth=35 reliefairgap=15
PlaneConnect PadTherm_-TC60-0.8 [InPadClass('-TC60-0.8')] p36: planeconnectstyle=Relief reliefexpansion=14.25 reliefentries=4 reliefconductorwidth=15 reliefairgap=15
PlaneConnect PadTherm_-TC60-0.9 [InPadClass('-TC60-0.9')] p37: planeconnectstyle=Relief reliefexpansion=14.78 reliefentries=4 reliefconductorwidth=15 reliefairgap=15
PlaneConnect PadTherm_-TC70-1.0 [InPadClass('-TC70-1.0')] p38: planeconnectstyle=Relief reliefexpansion=17.82 reliefentries=4 reliefconductorwidth=15 reliefairgap=15
PlaneConnect PadTherm_-TC80-1.0 [InPadClass('-TC80-1.0')] p39: planeconnectstyle=Relief reliefexpansion=15.31 reliefentries=4 reliefconductorwidth=20 reliefairgap=15
PlaneConnect PadTherm_TS48x68-0.8 [InPadClass('TS48x68-0.8')] p40: planeconnectstyle=Relief reliefexpansion=4.25 reliefentries=4 reliefconductorwidth=8 reliefairgap=10
PlaneConnect PadTherm_-TS60-0.9 [InPadClass('-TS60-0.9')] p41: planeconnectstyle=Relief reliefexpansion=14.78 reliefentries=4 reliefconductorwidth=15 reliefairgap=15
PlaneConnect PadTherm_TS60-1.0 [InPadClass('TS60-1.0')] p42: planeconnectstyle=Relief reliefexpansion=15.31 reliefentries=4 reliefconductorwidth=15 reliefairgap=15
PlaneConnect PadTherm_-TS80-1.0 [InPadClass('-TS80-1.0')] p43: planeconnectstyle=Relief reliefexpansion=15.31 reliefentries=4 reliefconductorwidth=20 reliefairgap=15
PlaneConnect [All] p44: planeconnectstyle=Relief reliefexpansion=20 reliefentries=4 reliefconductorwidth=10 reliefairgap=10
PolygonConnect PolygonConnect_52 [IsPolygon And InNet('NET00072') And OnLayer('Bottom Layer, Bottom') vs IsVia] p1: connectstyle=Direct reliefconductorwidth=15 reliefentries=4 polygonreliefangle="90 Angle" airgapwidth=10
PolygonConnect PolygonConnect_51 [IsPolygon And InNet('NET00072') And OnLayer('Bottom Layer, Bottom') vs IsPad] p2: connectstyle=Direct reliefconductorwidth=15 reliefentries=4 polygonreliefangle="90 Angle" airgapwidth=10
PolygonConnect PolygonConnect_50 [IsPolygon And InNet('NET00071') And OnLayer('Bottom Layer, Bottom') vs IsVia] p3: connectstyle=Direct reliefconductorwidth=15 reliefentries=4 polygonreliefangle="90 Angle" airgapwidth=10
PolygonConnect PolygonConnect_49 [IsPolygon And InNet('NET00071') And OnLayer('Bottom Layer, Bottom') vs IsPad] p4: connectstyle=Direct reliefconductorwidth=15 reliefentries=4 polygonreliefangle="90 Angle" airgapwidth=10
PolygonConnect PolygonConnect_48 [IsPolygon And InNet('NET00005') And OnLayer('Bottom Layer, Bottom') vs IsVia] p5: connectstyle=Direct reliefconductorwidth=15 reliefentries=4 polygonreliefangle="90 Angle" airgapwidth=10
PolygonConnect PolygonConnect_47 [IsPolygon And InNet('NET00005') And OnLayer('Bottom Layer, Bottom') vs IsPad] p6: connectstyle=Direct reliefconductorwidth=15 reliefentries=4 polygonreliefangle="90 Angle" airgapwidth=10
PolygonConnect PolygonConnect_46 [IsPolygon And InNet('NET00013') And OnLayer('Bottom Layer, Bottom') vs IsVia] p7: connectstyle=Direct reliefconductorwidth=15 reliefentries=4 polygonreliefangle="90 Angle" airgapwidth=10
PolygonConnect PolygonConnect_45 [IsPolygon And InNet('NET00013') And OnLayer('Bottom Layer, Bottom') vs IsPad] p8: connectstyle=Direct reliefconductorwidth=15 reliefentries=4 polygonreliefangle="90 Angle" airgapwidth=10
PolygonConnect PolygonConnect_44 [IsPolygon And InNet('5.0V') And OnLayer('Bottom Layer, Bottom') vs IsVia] p9: connectstyle=Direct reliefconductorwidth=15 reliefentries=4 polygonreliefangle="90 Angle" airgapwidth=10
PolygonConnect PolygonConnect_43 [IsPolygon And InNet('5.0V') And OnLayer('Bottom Layer, Bottom') vs IsPad] p10: connectstyle=Direct reliefconductorwidth=15 reliefentries=4 polygonreliefangle="90 Angle" airgapwidth=10
PolygonConnect PolygonConnect_42 [IsPolygon And InNet('3.3V') And OnLayer('Bottom Layer, Bottom') vs IsVia] p11: connectstyle=Direct reliefconductorwidth=15 reliefentries=4 polygonreliefangle="90 Angle" airgapwidth=10
PolygonConnect PolygonConnect_41 [IsPolygon And InNet('3.3V') And OnLayer('Bottom Layer, Bottom') vs IsPad] p12: connectstyle=Direct reliefconductorwidth=15 reliefentries=4 polygonreliefangle="90 Angle" airgapwidth=10
PolygonConnect PolygonConnect_40 [IsPolygon And InNet('NET00004') And OnLayer('Bottom Layer, Bottom') vs IsVia] p13: connectstyle=Direct reliefconductorwidth=15 reliefentries=4 polygonreliefangle="90 Angle" airgapwidth=10
PolygonConnect PolygonConnect_39 [IsPolygon And InNet('NET00004') And OnLayer('Bottom Layer, Bottom') vs IsPad] p14: connectstyle=Direct reliefconductorwidth=15 reliefentries=4 polygonreliefangle="90 Angle" airgapwidth=10
PolygonConnect PolygonConnect_38 [IsPolygon And InNet('NET00003') And OnLayer('Bottom Layer, Bottom') vs IsVia] p15: connectstyle=Direct reliefconductorwidth=15 reliefentries=4 polygonreliefangle="90 Angle" airgapwidth=10
PolygonConnect PolygonConnect_37 [IsPolygon And InNet('NET00003') And OnLayer('Bottom Layer, Bottom') vs IsPad] p16: connectstyle=Direct reliefconductorwidth=15 reliefentries=4 polygonreliefangle="90 Angle" airgapwidth=10
PolygonConnect PolygonConnect_36 [IsPolygon And InNet('GND') And OnLayer('Bottom Layer, Bottom') vs IsVia] p17: connectstyle=Direct reliefconductorwidth=15 reliefentries=4 polygonreliefangle="90 Angle" airgapwidth=10
PolygonConnect PolygonConnect_35 [IsPolygon And InNet('GND') And OnLayer('Bottom Layer, Bottom') vs IsPad] p18: connectstyle=Direct reliefconductorwidth=15 reliefentries=4 polygonreliefangle="90 Angle" airgapwidth=10
PolygonConnect PolygonConnect_34 [IsPolygon And InNet('1.2V') And OnLayer('Bottom Layer, Bottom') vs IsVia] p19: connectstyle=Direct reliefconductorwidth=15 reliefentries=4 polygonreliefangle="90 Angle" airgapwidth=10
PolygonConnect PolygonConnect_33 [IsPolygon And InNet('1.2V') And OnLayer('Bottom Layer, Bottom') vs IsPad] p20: connectstyle=Direct reliefconductorwidth=15 reliefentries=4 polygonreliefangle="90 Angle" airgapwidth=10
PolygonConnect PolygonConnect_32 [IsPolygon And InNet('1.8V') And OnLayer('Bottom Layer, Bottom') vs IsVia] p21: connectstyle=Direct reliefconductorwidth=15 reliefentries=4 polygonreliefangle="90 Angle" airgapwidth=10
PolygonConnect PolygonConnect_31 [IsPolygon And InNet('1.8V') And OnLayer('Bottom Layer, Bottom') vs IsPad] p22: connectstyle=Direct reliefconductorwidth=15 reliefentries=4 polygonreliefangle="90 Angle" airgapwidth=10
PolygonConnect PolygonConnect_30 [IsPolygon And InNet('2.5V') And OnLayer('Bottom Layer, Bottom') vs IsVia] p23: connectstyle=Direct reliefconductorwidth=15 reliefentries=4 polygonreliefangle="90 Angle" airgapwidth=10
PolygonConnect PolygonConnect_29 [IsPolygon And InNet('2.5V') And OnLayer('Bottom Layer, Bottom') vs IsPad] p24: connectstyle=Direct reliefconductorwidth=15 reliefentries=4 polygonreliefangle="90 Angle" airgapwidth=10
PolygonConnect PolygonConnect_28 [IsPolygon And InNet('NET00072') And OnLayer('Top Layer, Top') vs IsVia] p25: connectstyle=Direct reliefconductorwidth=15 reliefentries=4 polygonreliefangle="90 Angle" airgapwidth=10
PolygonConnect PolygonConnect_27 [IsPolygon And InNet('NET00072') And OnLayer('Top Layer, Top') vs IsPad] p26: connectstyle=Direct reliefconductorwidth=15 reliefentries=4 polygonreliefangle="90 Angle" airgapwidth=10
PolygonConnect PolygonConnect_26 [IsPolygon And InNet('NET00071') And OnLayer('Top Layer, Top') vs IsVia] p27: connectstyle=Direct reliefconductorwidth=15 reliefentries=4 polygonreliefangle="90 Angle" airgapwidth=10
PolygonConnect PolygonConnect_25 [IsPolygon And InNet('NET00071') And OnLayer('Top Layer, Top') vs IsPad] p28: connectstyle=Direct reliefconductorwidth=15 reliefentries=4 polygonreliefangle="90 Angle" airgapwidth=10
PolygonConnect PolygonConnect_24 [IsPolygon And InNet('NET00005') And OnLayer('Top Layer, Top') vs IsVia] p29: connectstyle=Direct reliefconductorwidth=15 reliefentries=4 polygonreliefangle="90 Angle" airgapwidth=10
PolygonConnect PolygonConnect_23 [IsPolygon And InNet('NET00005') And OnLayer('Top Layer, Top') vs IsPad] p30: connectstyle=Direct reliefconductorwidth=15 reliefentries=4 polygonreliefangle="90 Angle" airgapwidth=10
PolygonConnect PolygonConnect_22 [IsPolygon And InNet('NET00013') And OnLayer('Top Layer, Top') vs IsVia] p31: connectstyle=Direct reliefconductorwidth=15 reliefentries=4 polygonreliefangle="90 Angle" airgapwidth=10
PolygonConnect PolygonConnect_21 [IsPolygon And InNet('NET00013') And OnLayer('Top Layer, Top') vs IsPad] p32: connectstyle=Direct reliefconductorwidth=15 reliefentries=4 polygonreliefangle="90 Angle" airgapwidth=10
PolygonConnect PolygonConnect_20 [IsPolygon And InNet('NET00004') And OnLayer('Top Layer, Top') vs IsVia] p33: connectstyle=Direct reliefconductorwidth=15 reliefentries=4 polygonreliefangle="90 Angle" airgapwidth=10
PolygonConnect PolygonConnect_19 [IsPolygon And InNet('NET00004') And OnLayer('Top Layer, Top') vs IsPad] p34: connectstyle=Direct reliefconductorwidth=15 reliefentries=4 polygonreliefangle="90 Angle" airgapwidth=10
PolygonConnect PolygonConnect_18 [IsPolygon And InNet('NET00003') And OnLayer('Top Layer, Top') vs IsVia] p35: connectstyle=Direct reliefconductorwidth=15 reliefentries=4 polygonreliefangle="90 Angle" airgapwidth=10
PolygonConnect PolygonConnect_17 [IsPolygon And InNet('NET00003') And OnLayer('Top Layer, Top') vs IsPad] p36: connectstyle=Direct reliefconductorwidth=15 reliefentries=4 polygonreliefangle="90 Angle" airgapwidth=10
PolygonConnect PolygonConnect_16 [IsPolygon And InNet('5.0V') And OnLayer('Top Layer, Top') vs IsVia] p37: connectstyle=Direct reliefconductorwidth=15 reliefentries=4 polygonreliefangle="90 Angle" airgapwidth=10
PolygonConnect PolygonConnect_15 [IsPolygon And InNet('5.0V') And OnLayer('Top Layer, Top') vs IsPad] p38: connectstyle=Direct reliefconductorwidth=15 reliefentries=4 polygonreliefangle="90 Angle" airgapwidth=10
PolygonConnect PolygonConnect_14 [IsPolygon And InNet('1.2V') And OnLayer('Top Layer, Top') vs IsVia] p39: connectstyle=Direct reliefconductorwidth=15 reliefentries=4 polygonreliefangle="90 Angle" airgapwidth=10
PolygonConnect PolygonConnect_13 [IsPolygon And InNet('1.2V') And OnLayer('Top Layer, Top') vs IsPad] p40: connectstyle=Direct reliefconductorwidth=15 reliefentries=4 polygonreliefangle="90 Angle" airgapwidth=10
PolygonConnect PolygonConnect_12 [IsPolygon And InNet('1.8V') And OnLayer('Top Layer, Top') vs IsVia] p41: connectstyle=Direct reliefconductorwidth=15 reliefentries=4 polygonreliefangle="90 Angle" airgapwidth=10
PolygonConnect PolygonConnect_11 [IsPolygon And InNet('1.8V') And OnLayer('Top Layer, Top') vs IsPad] p42: connectstyle=Direct reliefconductorwidth=15 reliefentries=4 polygonreliefangle="90 Angle" airgapwidth=10
PolygonConnect PolygonConnect_10 [IsPolygon And InNet('3.3V') And OnLayer('Top Layer, Top') vs IsVia] p43: connectstyle=Direct reliefconductorwidth=15 reliefentries=4 polygonreliefangle="90 Angle" airgapwidth=10
PolygonConnect PolygonConnect_9 [IsPolygon And InNet('3.3V') And OnLayer('Top Layer, Top') vs IsPad] p44: connectstyle=Direct reliefconductorwidth=15 reliefentries=4 polygonreliefangle="90 Angle" airgapwidth=10
PolygonConnect PolygonConnect_8 [IsPolygon And InNet('2.5V') And OnLayer('Top Layer, Top') vs IsVia] p45: connectstyle=Direct reliefconductorwidth=15 reliefentries=4 polygonreliefangle="90 Angle" airgapwidth=10
PolygonConnect PolygonConnect_7 [IsPolygon And InNet('2.5V') And OnLayer('Top Layer, Top') vs IsPad] p46: connectstyle=Direct reliefconductorwidth=15 reliefentries=4 polygonreliefangle="90 Angle" airgapwidth=10
PolygonConnect PolygonConnect_6 [IsPolygon And InNet('THERMAL_SW2') And OnLayer('Top Layer, Top') vs IsVia] p47: connectstyle=Direct reliefconductorwidth=15 reliefentries=4 polygonreliefangle="90 Angle" airgapwidth=10
PolygonConnect PolygonConnect_5 [IsPolygon And InNet('THERMAL_SW2') And OnLayer('Top Layer, Top') vs IsPad] p48: connectstyle=Direct reliefconductorwidth=15 reliefentries=4 polygonreliefangle="90 Angle" airgapwidth=10
PolygonConnect PolygonConnect_4 [IsPolygon And InNet('THERMAL_SW1') And OnLayer('Top Layer, Top') vs IsVia] p49: connectstyle=Direct reliefconductorwidth=15 reliefentries=4 polygonreliefangle="90 Angle" airgapwidth=10
PolygonConnect PolygonConnect_3 [IsPolygon And InNet('THERMAL_SW1') And OnLayer('Top Layer, Top') vs IsPad] p50: connectstyle=Direct reliefconductorwidth=15 reliefentries=4 polygonreliefangle="90 Angle" airgapwidth=10
PolygonConnect PolygonConnect_2 [IsPolygon And InNet('GND') And OnLayer('Top Layer, Top') vs IsVia] p51: connectstyle=Direct reliefconductorwidth=15 reliefentries=4 polygonreliefangle="90 Angle" airgapwidth=10
PolygonConnect PolygonConnect_1 [IsPolygon And InNet('GND') And OnLayer('Top Layer, Top') vs IsPad] p52: connectstyle=Direct reliefconductorwidth=15 reliefentries=4 polygonreliefangle="90 Angle" airgapwidth=10
PolygonConnect [All] p53: connectstyle=Relief reliefconductorwidth=10 reliefentries=4 polygonreliefangle="90 Angle" airgapwidth=10
RoutingVias [All] p1: holewidth=28 width=50 viastyle="Through Hole" minholewidth=28 minwidth=50 maxholewidth=28 maxwidth=50
SolderMaskExpansion [All] p1: expansion=4
Width [All] p1: maxlimit=10 minlimit=10 preferedwidth=10
28 further rules are at their usual default settings.

## Classes and differential pairs
pad class -TS80-1.0: JP1-1
pad class TS60-1.0: J8-1a
pad class -TS60-0.9: J11-1
pad class TS48x68-0.8: J1-1 J1-2 J1-3 J1-4 J1-5 J1-6 J1-7 J1-8 J1-9 J1-10 J6-1 J6-2 J6-3 J6-4 J6-5 J6-6 J6-7 J6-8 J6-9 J6-10 J6-11 J6-12 J6-13 J6-14 J6-15 J6-16 J6-17 J6-18 J6-19 J6-20 J6-21 J6-22 J6-23 J6-24 J6-25 J6-26 J7-1 J7-2 J7-3 J7-4 J7-5 J7-6 J7-7 J7-8 J7-9 J7-10 J7-11 J7-12 J7-13 J7-14 J7-15 J7-16 J7-17 J7-18 J7-19 J7-20 J7-21 J7-22 J7-23 J7-24 J7-25 J7-26
pad class -TC80-1.0: JP1-2 JP1-3 S1-4 S1-5 S1-C S1-NC S1-NO
pad class -TC70-1.0: J9-9 J9-10 J9-11 J9-12 J9-21 J9-22 J9-23 J9-24
pad class -TC60-0.9: J8-1b J8-1c J8-2a J8-2b J8-2c J8-3a J8-3b J8-3c J8-4a J8-4b J8-4c J8-5a J8-5b J8-5c J8-6a J8-6b J8-6c J8-7a J8-7b J8-7c J8-8a J8-8b J8-8c J8-9a J8-9b J8-9c J8-10a J8-10b J8-10c J8-11a J8-11b J8-11c J8-12a J8-12b J8-12c J8-13a J8-13b J8-13c J8-14a J8-14b J8-14c J8-15a J8-15b J8-15c J8-16a J8-16b J8-16c J8-17a J8-17b J8-17c J8-18a J8-18b J8-18c J8-19a J8-19b J8-19c J8-20a J8-20b J8-20c J8-21a J8-21b J8-21c J8-22a J8-22b J8-22c J8-23a J8-23b J8-23c J8-24a J8-24b J8-24c J8-25a J8-25b J8-25c J8-26a J8-26b J8-26c J8-27a J8-27b J8-27c J8-28a J8-28b J8-28c J8-29a J8-29b J8-29c J8-30a J8-30b J8-30c J8-31a J8-31b J8-31c J8-32a J8-32b J8-32c J9-1 J9-2 J9-3 J9-4 J9-5 J9-6 J9-7 J9-8 J9-13 J9-14 J9-15 J9-16 J9-17 J9-18 J9-19 J9-20 J11-2 J11-3 J11-4 J11-5 J11-6 J11-7 J11-8 J11-9 J11-10
pad class -TC60-0.8: LD2-1 LD2-2 LD2-3 LD2-4 LD2-5 LD2-6 LD2-7 LD2-8
pad class -TC150-1.3: PT1-1 PT2-1 PT3-1 PT4-1 PT5-1 PT6-1 PT7-1 PT8-1
pad class -TC100-1.6: J9-25 J9-26 J9-27
pad class SMD80X16: U12-1 U12-2 U12-3 U12-4 U12-5 U12-6 U12-7 U12-8 U12-9 U12-10 U12-11 U12-12 U12-13 U12-14 U12-15 U12-16 U12-17 U12-18 U12-19 U12-20
pad class SMD64X16: U7-1 U7-2 U7-3 U7-4 U7-5 U7-6 U7-7 U7-8 U7-9 U7-10 U7-11 U7-12 U7-13 U7-14 U7-15 U7-16 U7-17 U7-18 U7-19 U7-20 U7-21 U7-22 U7-23 U7-24 U7-25 U7-26 U7-27 U7-28 U7-29 U7-30 U7-31 U7-32 U7-33 U7-34 U7-35 U7-36 U7-37 U7-38 U7-39 U7-40 U7-41 U7-42 U7-43 U7-44 U7-45 U7-46 U7-47 U7-48 U7-49 U7-50 U7-51 U7-52 U7-53 U7-54
pad class SMD64X12: U6-1 U6-2 U6-3 U6-4 U6-5 U6-6 U6-7 U6-8 U6-9 U6-10 U6-11 U6-12 U6-13 U6-14 U6-15 U6-16 U6-17 U6-18 U6-19 U6-20 U6-21 U6-22 U6-23 U6-24 U6-25 U6-26 U6-27 U6-28 U6-29 U6-30 U6-31 U6-32 U6-33 U6-34 U6-35 U6-36 U6-37 U6-38 U6-39 U6-40 U6-41 U6-42 U6-43 U6-44 U6-45 U6-46 U6-47 U6-48 U6-49 U6-50 U6-51 U6-52 U6-53 U6-54 U6-55 U6-56
pad class SMD4X2.05: J10-7 J10-9
pad class SMD45X35: U2-2 U2-3 U2-4
pad class SMD35X30: D1-1 D1-2 D1-3 D2-1 D2-2 D2-3
pad class SMD3.5X2.05: J10-6 J10-8
pad class SMD3.1x3.1: U9-33
pad class SMD3.0X2.0: S2-1 S2-2 S2-3 S2-4
pad class SMD2.6x1.2: SW1-1 SW1-2 SW1-3 SW1-4 SW1-5 SW1-6 SW1-7 SW1-8
pad class SMD2.5X1.2: J2-51 J2-52 J2-53 J2-54 J3-51 J3-52 J3-53 J3-54 J4-51 J4-52 J4-53 J4-54 J5-51 J5-52 J5-53 J5-54
pad class SMD2.25X0.5: J10-1 J10-2 J10-3 J10-4 J10-5
pad class SMD2.0x1.8: U4-1 U4-2 U4-3 U4-4 U8-1 U8-2 U8-3 U8-4
pad class SMD130X45: U2-1
pad class SMD1.8x0.4: U11-1 U11-2 U11-3 U11-4 U11-5 U11-6 U11-7 U11-8 U11-9 U11-10 U11-11 U11-12 U11-13 U11-14 U11-15 U11-16 U11-17 U11-18 U11-19 U11-20 U11-21 U11-22 U11-23 U11-24 U11-25 U11-26 U11-27 U11-28
pad class SMD1.6x1.4: C8-1 C8-2 C9-1 C9-2 R1-1 R1-2 R2-1 R2-2 R3-1 R3-2 R4-1 R4-2 R5-1 R5-2 R6-1 R6-2
pad class SMD1.2x1.0: C19-1 C19-2 C20-1 C20-2 C21-1 C21-2 C22-1 C22-2 C37-1 C37-2 C38-1 C38-2 C39-1 C39-2 C40-1 C40-2 C41-1 C41-2 C42-1 C42-2 C43-1 C43-2 C44-1 C44-2 C45-1 C45-2 C46-1 C46-2 C47-1 C47-2 C48-1 C48-2 C49-1 C49-2 C50-1 C50-2 C51-1 C51-2 C52-1 C52-2 C53-1 C53-2 C54-1 C54-2 C55-1 C55-2 C56-1 C56-2 C57-1 C57-2 C58-1 C58-2 R51-1 R51-2
pad class SMD1.1X0.8: J2-a1 J2-a2 J2-a3 J2-a4 J2-a5 J2-a6 J2-a7 J2-a8 J2-a9 J2-a10 J2-a11 J2-a12 J2-a13 J2-a14 J2-a15 J2-a16 J2-a17 J2-a18 J2-a19 J2-a20 J2-a21 J2-a22 J2-a23 J2-a24 J2-a25 J2-b1 J2-b2 J2-b3 J2-b4 J2-b5 J2-b6 J2-b7 J2-b8 J2-b9 J2-b10 J2-b11 J2-b12 J2-b13 J2-b14 J2-b15 J2-b16 J2-b17 J2-b18 J2-b19 J2-b20 J2-b21 J2-b22 J2-b23 J2-b24 J2-b25 J3-a1 J3-a2 J3-a3 J3-a4 J3-a5 J3-a6 J3-a7 J3-a8 J3-a9 J3-a10 J3-a11 J3-a12 J3-a13 J3-a14 J3-a15 J3-a16 J3-a17 J3-a18 J3-a19 J3-a20 J3-a21 J3-a22 J3-a23 J3-a24 J3-a25 J3-b1 J3-b2 J3-b3 J3-b4 J3-b5 J3-b6 J3-b7 J3-b8 J3-b9 J3-b10 J3-b11 J3-b12 J3-b13 J3-b14 J3-b15 J3-b16 J3-b17 J3-b18 J3-b19 J3-b20 J3-b21 J3-b22 J3-b23 J3-b24 J3-b25 J4-a1 J4-a2 J4-a3 J4-a4 J4-a5 J4-a6 J4-a7 J4-a8 J4-a9 J4-a10 J4-a11 J4-a12 J4-a13 J4-a14 J4-a15 J4-a16 J4-a17 J4-a18 J4-a19 J4-a20 J4-a21 J4-a22 J4-a23 J4-a24 J4-a25 J4-b1 J4-b2 J4-b3 J4-b4 J4-b5 J4-b6 J4-b7 J4-b8 J4-b9 J4-b10 J4-b11 J4-b12 J4-b13 J4-b14 J4-b15 J4-b16 J4-b17 J4-b18 J4-b19 J4-b20 J4-b21 J4-b22 J4-b23 J4-b24 J4-b25 J5-a1 J5-a2 J5-a3 J5-a4 J5-a5 J5-a6 J5-a7 J5-a8 J5-a9 J5-a10 J5-a11 J5-a12 J5-a13 J5-a14 J5-a15 J5-a16 J5-a17 J5-a18 J5-a19 J5-a20 J5-a21 J5-a22 J5-a23 J5-a24 J5-a25 J5-b1 J5-b2 J5-b3 J5-b4 J5-b5 J5-b6 J5-b7 J5-b8 J5-b9 J5-b10 J5-b11 J5-b12 J5-b13 J5-b14 J5-b15 J5-b16 J5-b17 J5-b18 J5-b19 J5-b20 J5-b21 J5-b22 J5-b23 J5-b24 J5-b25
pad class SMD0.63X0.63: U1-2 U1-3 U1-4 U1-5 U1-6 U1-7 U1-8 U1-9 U1-10 U1-11 U1-12 U1-13 U1-14 U1-15 U1-16 U1-17 U1-18 U1-19 U1-20 U1-21 U1-22 U1-23 U1-24 U1-25 U1-26 U1-27 U1-28 U1-29 U1-30 U1-31 U1-32 U1-33 U1-34 U1-35 U1-36 U1-37 U1-38 U1-39 U1-40 U1-41 U1-42 U1-43 U1-44 U1-45 U1-46 U1-47 U1-48 U1-49 U1-50 U1-51 U1-52 U1-53 U1-54 U1-55 U1-56 U1-57 U1-58 U1-59 U1-60 U1-61 U1-62 U1-63 U1-64 U1-65 U1-66 U1-67 U1-68 U1-69 U1-70 U1-71 U1-72 U1-73 U1-74 U1-75 U1-76 U1-77 U1-78 U1-79 U1-80 U1-81 U1-82 U1-83 U1-84 U1-85 U1-86 U1-87 U1-88 U1-89 U1-90 U1-91 U1-92 U1-93 U1-94 U1-95 U1-96 U1-97 U1-98 U1-99 U1-100 U1-101 U1-102 U1-103 U1-104 U1-105 U1-106 U1-107 U1-108 U1-109 U1-110 U1-111 U1-112 U1-113 U1-114 U1-115 U1-116 U1-117 U1-118 U1-119 U1-120 U1-121 U1-122 U1-123 U1-124 U1-125 U1-126 U1-127 U1-128 U1-129 U1-130 U1-131 U1-132 U1-133 U1-134 U1-135 U1-136 U1-137 U1-138 U1-139 U1-140 U1-141 U1-142 U1-143 U1-144
pad class SMD0.63MM: U1-1
pad class SMD0.5X0.4: U5-1 U5-2 U5-3 U5-4 U5-5
pad class SMD0.45: U3-A1 U3-A2 U3-A3 U3-A4 U3-A5 U3-A6 U3-A7 U3-A8 U3-A9 U3-A10 U3-A11 U3-A12 U3-A13 U3-A14 U3-A15 U3-A16 U3-A17 U3-A18 U3-A19 U3-A20 U3-A21 U3-A22 U3-AA1 U3-AA2 U3-AA3 U3-AA4 U3-AA5 U3-AA6 U3-AA7 U3-AA8 U3-AA9 U3-AA10 U3-AA11 U3-AA12 U3-AA13 U3-AA14 U3-AA15 U3-AA16 U3-AA17 U3-AA18 U3-AA19 U3-AA20 U3-AA21 U3-AA22 U3-AB1 U3-AB2 U3-AB3 U3-AB4 U3-AB5 U3-AB6 U3-AB7 U3-AB8 U3-AB9 U3-AB10 U3-AB11 U3-AB12 U3-AB13 U3-AB14 U3-AB15 U3-AB16 U3-AB17 U3-AB18 U3-AB19 U3-AB20 U3-AB21 U3-AB22 U3-B1 U3-B2 U3-B3 U3-B4 U3-B5 U3-B6 U3-B7 U3-B8 U3-B9 U3-B10 U3-B11 U3-B12 U3-B13 U3-B14 U3-B15 U3-B16 U3-B17 U3-B18 U3-B19 U3-B20 U3-B21 U3-B22 U3-C1 U3-C2 U3-C3 U3-C4 U3-C5 U3-C6 U3-C7 U3-C8 U3-C9 U3-C10 U3-C11 U3-C12 U3-C13 U3-C14 U3-C15 U3-C16 U3-C17 U3-C18 U3-C19 U3-C20 U3-C21 U3-C22 U3-D1 U3-D2 U3-D3 U3-D4 U3-D5 U3-D6 U3-D7 U3-D8 U3-D9 U3-D10 U3-D11 U3-D12 U3-D13 U3-D14 U3-D15 U3-D16 U3-D17 U3-D18 U3-D19 U3-D20 U3-D21 U3-D22 U3-E1 U3-E2 U3-E3 U3-E4 U3-E5 U3-E6 U3-E7 U3-E8 U3-E9 U3-E10 U3-E11 U3-E12 U3-E13 U3-E14 U3-E15 U3-E16 U3-E17 U3-E18 U3-E19 U3-E20 U3-E21 U3-E22 U3-F1 U3-F2 U3-F3 U3-F4 U3-F5 U3-F6 U3-F7 U3-F8 U3-F9 U3-F10 U3-F11 U3-F12 U3-F13 U3-F14 U3-F15 U3-F16 U3-F17 U3-F18 U3-F19 U3-F20 U3-F21 U3-F22 U3-G1 U3-G2 U3-G3 U3-G4 U3-G5 U3-G6 U3-G7 U3-G8 U3-G9 U3-G10 U3-G11 U3-G12 U3-G13 U3-G14 U3-G15 U3-G16 U3-G17 U3-G18 U3-G19 U3-G20 U3-G21 U3-G22 U3-H1 U3-H2 U3-H3 U3-H4 U3-H5 U3-H6 U3-H7 U3-H8 U3-H9 U3-H10 U3-H11 U3-H12 U3-H13 U3-H14 U3-H15 U3-H16 U3-H17 U3-H18 U3-H19 U3-H20 U3-H21 U3-H22 U3-J1 U3-J2 U3-J3 U3-J4 U3-J5 U3-J6 U3-J7 U3-J8 U3-J9 U3-J10 U3-J11 U3-J12 U3-J13 U3-J14 U3-J15 U3-J16 U3-J17 U3-J18 U3-J19 U3-J20 U3-J21 U3-J22 U3-K1 U3-K2 U3-K3 U3-K4 U3-K5 U3-K6 U3-K7 U3-K8 U3-K9 U3-K10 U3-K11 U3-K12 U3-K13 U3-K14 U3-K15 U3-K16 U3-K17 U3-K18 U3-K19 U3-K20 U3-K21 U3-K22 U3-L1 U3-L2 U3-L3 U3-L4 U3-L5 U3-L6 U3-L7 U3-L8 U3-L9 U3-L10 U3-L11 U3-L12 U3-L13 U3-L14 U3-L15 U3-L16 U3-L17 U3-L18 U3-L19 U3-L20 U3-L21 U3-L22 U3-M1 U3-M2 U3-M3 U3-M4 U3-M5 U3-M6 U3-M7 U3-M8 U3-M9 U3-M10 U3-M11 U3-M12 U3-M13 U3-M14 U3-M15 U3-M16 U3-M17 U3-M18 U3-M19 U3-M20 U3-M21 U3-M22 U3-N1 U3-N2 U3-N3 U3-N4 U3-N5 U3-N6 U3-N7 U3-N8 U3-N9 U3-N10 U3-N11 U3-N12 U3-N13 U3-N14 U3-N15 U3-N16 U3-N17 U3-N18 U3-N19 U3-N20 U3-N21 U3-N22 U3-P1 U3-P2 U3-P3 U3-P4 U3-P5 U3-P6 U3-P7 U3-P8 U3-P9 U3-P10 U3-P11 U3-P12 U3-P13 U3-P14 U3-P15 U3-P16 U3-P17 U3-P18 U3-P19 U3-P20 U3-P21 U3-P22 U3-R1 U3-R2 U3-R3 U3-R4 U3-R5 U3-R6 U3-R7 U3-R8 U3-R9 U3-R10 U3-R11 U3-R12 U3-R13 U3-R14 U3-R15 U3-R16 U3-R17 U3-R18 U3-R19 U3-R20 U3-R21 U3-R22 U3-T1 U3-T2 U3-T3 U3-T4 U3-T5 U3-T6 U3-T7 U3-T8 U3-T9 U3-T10 U3-T11 U3-T12 U3-T13 U3-T14 U3-T15 U3-T16 U3-T17 U3-T18 U3-T19 U3-T20 U3-T21 U3-T22 U3-U1 U3-U2 U3-U3 U3-U4 U3-U5 U3-U6 U3-U7 U3-U8 U3-U9 U3-U10 U3-U11 U3-U12 U3-U13 U3-U14 U3-U15 U3-U16 U3-U17 U3-U18 U3-U19 U3-U20 U3-U21 U3-U22 U3-V1 U3-V2 U3-V3 U3-V4 U3-V5 U3-V6 U3-V7 U3-V8 U3-V9 U3-V10 U3-V11 U3-V12 U3-V13 U3-V14 U3-V15 U3-V16 U3-V17 U3-V18 U3-V19 U3-V20 U3-V21 U3-V22 U3-W1 U3-W2 U3-W3 U3-W4 U3-W5 U3-W6 U3-W7 U3-W8 U3-W9 U3-W10 U3-W11 U3-W12 U3-W13 U3-W14 U3-W15 U3-W16 U3-W17 U3-W18 U3-W19 U3-W20 U3-W21 U3-W22 U3-Y1 U3-Y2 U3-Y3 U3-Y4 U3-Y5 U3-Y6 U3-Y7 U3-Y8 U3-Y9 U3-Y10 U3-Y11 U3-Y12 U3-Y13 U3-Y14 U3-Y15 U3-Y16 U3-Y17 U3-Y18 U3-Y19 U3-Y20 U3-Y21 U3-Y22
pad class SMD0.28X1.0: U9-1 U9-2 U9-3 U9-4 U9-5 U9-6 U9-7 U9-8 U9-9 U9-10 U9-11 U9-12 U9-13 U9-14 U9-15 U9-16 U9-17 U9-18 U9-19 U9-20 U9-21 U9-22 U9-23 U9-24 U9-25 U9-26 U9-27 U9-28 U9-29 U9-30 U9-31 U9-32
pad class SMD0.25X1.4: U10-1 U10-2 U10-3 U10-4 U10-5 U10-6 U10-7 U10-8 U10-9 U10-10 U10-11 U10-12 U10-13 U10-14 U10-15 U10-16 U10-17 U10-18 U10-19 U10-20 U10-21 U10-22 U10-23 U10-24 U10-25 U10-26 U10-27 U10-28 U10-29 U10-30 U10-31 U10-32 U10-33 U10-34 U10-35 U10-36 U10-37 U10-38 U10-39 U10-40 U10-41 U10-42 U10-43 U10-44 U10-45 U10-46 U10-47 U10-48
pad class P:SX96Y102D0T: C15-MINUS C15-PLUS C16-MINUS C16-PLUS
pad class P:SX64Y64D0T: C1-1 C1-2 C2-1 C2-2 C4-1 C4-2 C5-1 C5-2 C11-1 C11-2 C12-1 C12-2 C13-1 C13-2 C14-1 C14-2 C17-1 C17-2 C23-1 C23-2 C24-1 C24-2 C25-1 C25-2 C26-1 C26-2 C27-1 C27-2 C28-1 C28-2 C80-1 C80-2 C83-1 C83-2 JP7-1 JP7-2 JP7-3
pad class P:SX63Y63D0T: JP2-1 JP2-2 JP3-1 JP3-2 JP4-1 JP4-2 JP5-1 JP5-2 JP6-1 JP6-2 JP8-1 JP8-2 JP9-1 JP9-2 JP10-1 JP10-2 JP11-1 JP11-2
pad class P:SX60Y56D0T: C3-1 C3-2 C6-1 C6-2 C7-1 C7-2 C10-1 C10-2 C18-1 C18-2 C29-1 C29-2 C30-1 C30-2 C31-1 C31-2 C32-1 C32-2 C33-1 C33-2 C34-1 C34-2 C35-1 C35-2 C36-1 C36-2 C59-1 C59-2 C60-1 C60-2 C61-1 C61-2 C62-1 C62-2 C63-1 C63-2 C64-1 C64-2 C65-1 C65-2 C66-1 C66-2 C67-1 C67-2 C68-1 C68-2 C69-1 C69-2 C70-1 C70-2 C71-1 C71-2 C72-1 C72-2 C73-1 C73-2 C74-1 C74-2 C75-1 C75-2 C76-1 C76-2 C77-1 C77-2 C78-1 C78-2 C79-1 C79-2 C81-1 C81-2 C82-1 C82-2 C84-1 C84-2 C85-1 C85-2 C86-1 C86-2 C87-1 C87-2 C88-1 C88-2 C89-1 C89-2 C90-1 C90-2 C91-1 C91-2 C92-1 C92-2 C93-1 C93-2 C94-1 C94-2 C95-1 C95-2 C96-1 C96-2 C97-1 C97-2 C98-1 C98-2 C99-1 C99-2 C100-1 C100-2 C101-1 C101-2 C102-1 C102-2 C103-1 C103-2 C104-1 C104-2 C105-1 C105-2 C106-1 C106-2 C107-1 C107-2 L1-1 L1-2 L2-1 L2-2 LD1-1 LD1-2 R7-1 R7-2 R8-1 R8-2 R9-1 R9-2 R10-1 R10-2 R11-1 R11-2 R12-1 R12-2 R13-1 R13-2 R14-1 R14-2 R15-1 R15-2 R16-1 R16-2 R17-1 R17-2 R18-1 R18-2 R19-1 R19-2 R20-1 R20-2 R21-1 R21-2 R22-1 R22-2 R23-1 R23-2 R24-1 R24-2 R25-1 R25-2 R26-1 R26-2 R27-1 R27-2 R28-1 R28-2 R29-1 R29-2 R30-1 R30-2 R31-1 R31-2 R32-1 R32-2 R33-1 R33-2 R34-1 R34-2 R35-1 R35-2 R36-1 R36-2 R37-1 R37-2 R38-1 R38-2 R39-1 R39-2 R40-1 R40-2 R41-1 R41-2 R42-1 R42-2 R43-1 R43-2 R44-1 R44-2 R45-1 R45-2 R46-1 R46-2 R47-1 R47-2 R48-1 R48-2 R49-1 R49-2 R50-1 R50-2
pad class P:SX50Y100DOT: LC1-1 LC1-2 LC1-3 LC2-1 LC2-2 LC2-3
pad class hole3.2: J9-28 J9-29
pad class hole3.0: 1-1 2-1 3-1 4-1 J8-97 J8-98
pad class hole1.6: J2-55 J2-56 J3-55 J3-56 J4-55 J4-56 J5-55 J5-56
pad class hole0.9: J10-10 J10-11

## Components (designator, comment, footprint, x,y, rotation, side; value= is the part's Value field where it differs from the comment)
1 "" "UNCONNECTED NUT M2.5" 6215.75,5703.54 r0 top locked
2 "" "UNCONNECTED NUT M2.5" 6215.75,2396.46 r0 top locked
3 "" "UNCONNECTED NUT M2.5" 8184.25,5703.54 r0 top locked
4 "" "UNCONNECTED NUT M2.5" 8184.25,2396.46 r0 top locked
C1 "100uF" CC1206 4743.75,2512.5 r0 top
C2 "100uF" CC1206 5256.25,2512.5 r180 top
C3 "10uF 6.3V" CC0805 5043.75,2600 r180 top
C4 "22uF X7R" CC1206 4743.75,2600 r0 top
C5 "22uF X7R" CC1206 5256.25,2600 r180 top
C6 "100nF" CC0805 5412.5,3075 r270 top
C7 "10uF 6.3V" CC0805 5587.5,2987.5 r180 top
C8 "100nF" RC0603/0805 5225,2700 r180 bottom
C9 "100nF" RC0603/0805 4718.75,2700 r0 bottom
C10 "10uF 6.3V" CC0805 5043.75,3300 r180 top
C11 "22uF X7R" CC1206 4875,3300 r180 top
C12 "22uF X7R" CC1206 5256.25,3300 r180 top
C13 "22uF X7R" CC1206 4875,3387.5 r180 top
C14 "22uF X7R" CC1206 5256.25,3387.5 r180 top
C15 "220uF (AVX TPSY227K004R0050)" TC7343_CAPS7343P(TAJ-D)(Primary) 4600,3525 r0 top
C16 "220uF (AVX TPSY227K004R0050)" TC7343_CAPS7343P(TAJ-D)(Primary) 5125,3525 r0 top
C17 "100uF" CC1206-MM 7767.72,4153.54 r180 bottom
C18 "4.7uF" CC0805-MM 7724.41,4232.28 r180 bottom
C19 "470nF" RC0603-MM 7692.91,4311.02 r180 bottom
C20 "470nF" RC0603-MM 7692.91,4507.87 r180 bottom
C21 "470nF" RC0603-MM 7692.91,4704.72 r180 bottom
C22 "470nF" RC0603-MM 7692.91,4862.2 r180 bottom
C23 "100uF" CC1206-MM 6988.19,3960.63 r90 bottom
C24 "100uF" CC1206-MM 6625.98,3964.57 r90 bottom
C25 "100uF" CC1206-MM 6712.6,3964.57 r90 bottom
C26 "100uF" CC1206-MM 6523.62,5019.69 r0 bottom
C27 "100uF" CC1206-MM 7618.11,5208.66 r270 bottom
C28 "100uF" CC1206-MM 7303.15,3964.57 r90 bottom
C29 "4.7uF" CC0805-MM 7066.93,4350.39 r90 bottom
C30 "4.7uF" CC0805-MM 6566.93,4232.28 r0 bottom
C31 "4.7uF" CC0805-MM 6791.34,4007.87 r90 bottom
C32 "4.7uF" CC0805-MM 6566.93,4940.94 r0 bottom
C33 "4.7uF" CC0805-MM 7539.37,5165.35 r270 bottom
C34 "4.7uF" CC0805-MM 7224.41,4350.39 r90 bottom
C35 "4.7uF" CC0805-MM 7724.41,4940.94 r180 bottom
C36 "4.7uF" CC0805-MM 7145.67,4350.39 r90 bottom
C37 "470nF" RC0603-MM 7066.93,4559.06 r270 bottom
C38 "470nF" RC0603-MM 7145.67,4039.37 r90 bottom
C39 "470nF" RC0603-MM 6870.08,4039.37 r90 bottom
C40 "470nF" RC0603-MM 6598.43,4862.2 r0 bottom
C41 "470nF" RC0603-MM 7460.63,5133.86 r270 bottom
C42 "470nF" RC0603-MM 7145.67,4559.06 r270 bottom
C43 "470nF" RC0603-MM 6598.43,4586.61 r0 bottom
C44 "470nF" RC0603-MM 7066.93,4039.37 r90 bottom
C45 "470nF" RC0603-MM 6598.43,4704.72 r0 bottom
C46 "470nF" RC0603-MM 7303.15,5133.86 r270 bottom
C47 "470nF" RC0603-MM 7224.41,4559.06 r270 bottom
C48 "470nF" RC0603-MM 7145.67,5133.86 r270 bottom
C49 "470nF" RC0603-MM 7224.41,4039.37 r90 bottom
C50 "470nF" RC0603-MM 6598.43,4507.87 r0 bottom
C51 "470nF" RC0603-MM 7066.93,5133.86 r270 bottom
C52 "470nF" RC0603-MM 7066.93,4614.17 r90 bottom
C53 "470nF" RC0603-MM 7692.91,4586.61 r180 bottom
C54 "470nF" RC0603-MM 7421.26,4039.37 r90 bottom
C55 "470nF" RC0603-MM 6598.43,4311.02 r0 bottom
C56 "470nF" RC0603-MM 6909.45,5133.86 r270 bottom
C57 "470nF" RC0603-MM 7145.67,4614.17 r90 bottom
C58 "470nF" RC0603-MM 7224.41,4614.17 r90 bottom
C59 "100pF  (nc)" CC0805-MM 6566.93,5165.35 r0 bottom
C60 "100nF" CC0805-MM 6307.09,5082.68 r180 bottom
C61 "100nF" CC0805-MM 6724.41,2913.39 r0 bottom
C62 "100nF" CC0805-MM 6248.03,3031.5 r180 bottom
C63 "100nF" CC0805-MM 6724.41,3011.81 r0 bottom
C64 "100nF" CC0805-MM 6724.41,2814.96 r0 bottom
C65 "10uF" CC0805-MM 6724.41,3169.29 r0 bottom
C66 "10uF" CC0805-MM 6724.41,2736.22 r0 bottom
C67 "100nF" CC0805-MM 7366.14,3547.24 r180 bottom
C68 "100nF" CC0805-MM 7366.14,3476.38 r180 bottom
C69 "100nF" CC0805-MM 7366.14,3291.34 r180 bottom
C70 "100nF" CC0805-MM 7366.14,3133.86 r180 bottom
C71 "100nF" CC0805-MM 7366.14,2724.41 r180 bottom
C72 "100nF" CC0805-MM 7732.28,3196.85 r0 bottom
C73 "100nF" CC0805-MM 7732.28,3385.83 r0 bottom
C74 "100nF" CC0805-MM 3956.69,5641.73 r0 bottom
C75 "10uF" CC0805-MM 3956.69,5712.6 r0 bottom
C76 "100nF" CC0805-MM 3291.34,5511.81 r180 bottom
C77 "100nF" CC0805-MM 3291.34,5440.94 r180 bottom
C78 "100nF" CC0805-MM 3956.69,5570.87 r0 bottom
C79 "10uF" CC0805-MM 4125.98,5795.28 r270 bottom
C80 "22uF" CC1206-MM 3956.69,5492.13 r0 bottom
C81 "100nF" CC0805-MM 3818.9,5240.16 r0 bottom
C82 "100nF" CC0805-MM 4448.82,5472.44 r180 bottom
C83 "22uF" CC1206-MM 4448.82,5393.7 r180 bottom
C84 "10nF 50V" CC0805-MM 3712.6,5629.92 r180 top
C85 "10nF 50V" CC0805-MM 3712.6,5413.39 r180 top
C86 "Tantalum 10uF" CC0805-MM 3956.69,4952.76 r0 bottom
C87 "100nF" CC0805-MM 3956.69,5023.62 r0 bottom
C88 "100nF" CC0805-MM 3956.69,4881.89 r0 bottom
C89 "100nF" CC0805-MM 3291.34,4960.63 r180 bottom
C90 "100nF" CC0805-MM 3291.34,4889.76 r180 bottom
C91 "Tantalum 10uF" CC0805-MM 4606.3,5070.87 r180 bottom
C92 "100nF" CC0805-MM 4606.3,5000 r180 bottom
C93 "100nF" CC0805-MM 4606.3,4929.13 r180 bottom
C94 "100nF 50V" CC0805-MM 3712.6,5066.93 r180 top
C95 "100nF 50V" CC0805-MM 3712.6,4854.33 r180 top
C96 "Tantalum 10uF" CC0805-MM 4452.76,4751.97 r270 bottom
C97 "100nF" CC0805-MM 4381.89,4751.97 r270 bottom
C98 "100nF" CC0805-MM 4311.02,4751.97 r270 bottom
C99 "4.7uF 10V" CC0805-MM 3425.2,4232.28 r180 bottom
C100 "4.7uF 10V" CC0805-MM 3395.67,4381.89 r90 bottom
C101 "100pF" CC0805-MM 3466.54,4381.89 r90 bottom
C102 "100nF 10V" CC0805-MM 3261.81,4122.05 r270 bottom
C103 "100nF" CC0805-MM 3460.63,3763.78 r90 bottom
C104 "100nF" CC0805-MM 3641.73,3736.22 r0 bottom
C105 "100nF" CC0805-MM 3641.73,3807.09 r0 bottom
C106 "100nF" CC0805-MM 3641.73,3665.35 r0 bottom
C107 "100nF" CC0805-MM 3641.73,3877.95 r0 bottom
D1 "1N4148" SOT23 4389.76,5708.66 r0 bottom
D2 "1N4148" SOT23 4259.84,5708.66 r0 bottom
J1 "{Value}" CONN2X5-2MM-FCI-COUDE 3031.5,3562.99 r90 top
J2 "{Value}" ERNI-SMC-50P-FD_ERNI-SMC-50P-FD(Primary) 7200,2396.5 r90 top locked
J3 "{Value}" ERNI-SMC-50P-MD_ERNI-SMC-50P-MD(Primary) 7200,2396.5 r270 bottom locked
J4 "{Value}" ERNI-SMC-50P-FD_ERNI-SMC-50P-FD(Primary) 7200,5703.5 r90 top locked
J5 "{Value}" ERNI-SMC-50P-MD_ERNI-SMC-50P-MD(Primary) 7200,5703.5 r270 bottom locked
J6 "{Value}" ASSM-AWHW2-26G 8228.35,5314.96 r270 top
J7 "{Value}" ASSM-AWHW2-26G 8228.35,3740.16 r270 top
J8 "" CONN3X32_DIN41612-3X32FC(Primary) 8800,5600 r0 top
J9 "" RJ45-PULSE-J8064D628ANL 2700,5200 r270 top
J10 "USB Mini" USB-MINI-B-SMD 2700.79,4248.03 r0 top
J11 "{Value}" CONN2X5 4055.12,3917.32 r90 top
JP1 "{Value}" JUMPER3 4900,2400 r0 top
JP2 "Mez 5V" JUMPER-SMD 5000,2306.25 r0 top
JP3 "1.8V" JUMPER-SMD 4975,3800 r90 top
JP4 "3.3V" JUMPER-SMD 4800,3800 r90 top
JP5 "1.2V" JUMPER-SMD 5325,3800 r90 top
JP6 "2.5V" JUMPER-SMD 5500,3062.5 r90 top
JP7 "Voltage_Bank_0" JUMPER-SMD3 7696.85,3976.38 r180 top
JP8 "USB_TMS (NM)" JUMPER-SMD 3267.72,3641.73 r180 top
JP9 "USB_TCK" JUMPER-SMD 3267.72,3720.47 r180 top
JP10 "USB_TDO" JUMPER-SMD 3267.72,3799.21 r180 top
JP11 "USB_TDI" JUMPER-SMD 3267.72,3877.95 r180 top
L1 "1uH" L0805-MM 4043.31,5413.39 r180 bottom
L2 "1uH" L0805-MM 4043.31,5094.49 r180 bottom
LC1 "NFE31PT222" NFE31P 4678.05,3687.5 r0 top
LC2 "NFE31PT222" NFE31P 5203.05,3687.5 r0 top
LD1 "green" LED_SMD0805-MM 4409.45,2401.57 r90 top
LD2 "User Led" LED-569-010X-XXX 2700,2725 r0 top
PT1 "{Value}" CONN1X1M 5708.66,5708.66 r0 top
PT2 "1.8V" CONN1X1M 4975,3675 r0 top
PT3 "3.3V" CONN1X1M 4650,3837.5 r0 top
PT4 "1.2V" CONN1X1M 5175,3837.5 r0 top
PT5 "2.5V" CONN1X1M 5650,3100 r0 top
PT6 "{Value}" CONN1X1M 5708.66,2401.57 r0 top
PT7 "{Value}" CONN1X1M 6082.68,5078.74 r0 top
PT8 "{Value}" CONN1X1M 3681.1,5236.22 r180 top
R1 "1.43k" RC0603/0805 5050,2981.25 r270 bottom
R2 "10k" RC0603/0805 4950,2981.25 r270 bottom
R3 "10k" RC0603/0805 4718.75,2800 r0 bottom
R4 "10k" RC0603/0805 5225,2800 r180 bottom
R5 "10k" RC0603/0805 5225,2900 r180 bottom
R6 "1.6k" RC0603/0805 4718.75,2900 r0 bottom
R7 "0" RC0805-MM 7500,4007.87 r90 bottom
R8 "100 (nc)" RC0805-MM 6751.97,5165.35 r270 bottom
R9 "4.7k" RC0805-MM 7724.41,4783.46 r180 bottom
R10 "10k" RC0805-MM 3122.05,3641.73 r0 bottom
R11 "10k" RC0805-MM 3122.05,3720.47 r0 bottom
R12 "10k" RC0805-MM 3122.05,3877.95 r0 bottom
R13 "330" RC0805-MM 4322.83,2488.19 r270 bottom
R14 "100" RC0805-MM 4409.45,2401.57 r90 bottom
R15 "4.7k" RC0805-MM 3346.46,2500 r0 top
R16 "100" RC0805-MM 3433.07,2759.84 r180 top
R17 "100" RC0805-MM 3433.07,2830.71 r180 top
R18 "100" RC0805-MM 3433.07,2688.98 r180 top
R19 "100" RC0805-MM 3433.07,2618.11 r180 top
R20 "4.7k" RC0805-MM 3850,2312.5 r90 bottom
R21 "1k" RC0805-MM 6559.06,2913.39 r0 bottom
R22 "1k" RC0805-MM 6645.67,2736.22 r180 bottom
R23 "1k" RC0805-MM 6559.06,3090.55 r0 bottom
R24 "1k" RC0805-MM 6645.67,2814.96 r180 bottom
R25 "1k" RC0805-MM 6248.03,2952.76 r180 bottom
R26 "1k" RC0805-MM 6724.41,3090.55 r0 bottom
R27 "1k" RC0805-MM 6811.02,3267.72 r180 bottom
R28 "10k" RC0805-MM 7279.53,2976.38 r0 bottom
R29 "180" RC0805-MM 2885.83,5732.28 r270 bottom
R30 "180" RC0805-MM 2885.83,5318.9 r90 bottom
R31 "10k" RC0805-MM 4196.85,5708.66 r90 bottom
R32 "4.7k" RC0805-MM 4192.91,5374.02 r270 bottom
R33 "49.9 1%" RC0805-MM 3877.95,5559.06 r180 top
R34 "49.9 1%" RC0805-MM 3877.95,5629.92 r180 top
R35 "49.9 1%" RC0805-MM 3877.95,5413.39 r180 top
R36 "49.9 1%" RC0805-MM 3877.95,5484.25 r180 top
R37 "0 (nc)" RC0805-MM 3712.6,5559.06 r180 top
R38 "0 (nc)" RC0805-MM 3712.6,5484.25 r180 top
R39 "6.49k 1%" RC0805-MM 4118.11,5287.4 r90 bottom
R40 "180" RC0805-MM 3114.17,5181.1 r270 bottom
R41 "180" RC0805-MM 2885.83,4767.72 r90 bottom
R42 "49.9 1%" RC0805-MM 3877.95,4996.06 r180 top
R43 "49.9 1%" RC0805-MM 3877.95,5066.93 r180 top
R44 "49.9 1%" RC0805-MM 3877.95,4854.33 r180 top
R45 "49.9 1%" RC0805-MM 3877.95,4925.2 r180 top
R46 "0" RC0805-MM 3712.6,4996.06 r180 top
R47 "0" RC0805-MM 3712.6,4925.2 r180 top
R48 "4.87k 1%" RC0805-MM 4208.66,4960.63 r270 bottom
R49 "10k" RC0805-MM 4279.53,4874.02 r90 bottom
R50 "1.5k" RC0805-MM 4350.39,4874.02 r90 bottom
R51 "BLM18PG121SN1D" RC0603-MM 3338.58,4035.43 r90 bottom
S1 "Reset Button" PUSHBUTTON-03_PUSHBUTT-SH3-01(Primary) 3250,2300 r90 top
S2 "Button 2" PUSHBUTT-DTSM 3700,2487.5 r0 top
SW1 "" SW-CTS-193-4MS 2775,3325 r270 top
U1 "{Value}" LGA144_15X15MM 5275,2675 r90 top
U2 "{Value}" SOT223 5500,2650 r180 top
U3 "XC6SLX45 / 100 / 150" "BGA23X23-FG484_XC6SLX150 FGG484(Primary)" 7559.06,4173.23 r180 top
U4 "106.25MHz" OSCILL-VX3 6220.47,5000 r0 top
U5 "{Value}" SC70-5 6559.06,2980.32 r0 bottom
U6 "JSP28F128P30" TSOP56 6102.36,3267.72 r0 top
U7 "{Value}" TSOP54 7322.83,3543.31 r0 top
U8 "3.3V 25MHz" OSCILL-VX3 3818.9,5157.48 r0 top
U9 "{Value}" "QFN32 5X5" 4094.49,5610.24 r0 top
U10 "{Value}" LQFP48-P0.5-L7-C7 4389.76,5059.06 r270 top
U11 "FT232RL" SSOP28-P0.65-L10.2-C5.4 3543.31,4397.64 r270 top
U12 "{Value}" SSOP20 3543.31,3858.27 r0 top

## Footprints (in the part's own frame and the unit in brackets; to place one, negate y for a bottom-side part, rotate by r counter-clockwise, add the part's x,y. Pads: shape width x height; smd on the part's side, far side on the other; paste and mask are expansions set on the pad)
ASSM-AWHW2-26G [mm]
  rrect50% 1.219x1.727 hole 0.8: 1(0,0) 2(0,2) 3(2,0) 4(2,2) 5(4,0) 6(4,2) 7(6,0) 8(6,2) 9(8,0) 10(8,2) 11(10,0) 12(10,2) 13(12,0) 14(12,2) 15(14,0) 16(14,2) 17(16,0) 18(16,2) 19(18,0) 20(18,2) 21(20,0) 22(20,2) 23(22,0) 24(22,2) 25(24,0) 26(24,2)
  silkscreen extent -5,-2 29,4
"BGA23X23-FG484_XC6SLX150 FGG484(Primary)" [mm]
  round 0.45 smd: A1(0,0) A2(1,0) A3(2,0) A4(3,0) A5(4,0) A6(5,0) A7(6,0) A8(7,0) A9(8,0) A10(9,0) A11(10,0) A12(11,0) A13(12,0) A14(13,0) A15(14,0) A16(15,0) A17(16,0) A18(17,0) A19(18,0) A20(19,0) A21(20,0) A22(21,0) AA1(0,-20) AA2(1,-20) AA3(2,-20) AA4(3,-20) AA5(4,-20) AA6(5,-20) AA7(6,-20) AA8(7,-20) AA9(8,-20) AA10(9,-20) AA11(10,-20) AA12(11,-20) AA13(12,-20) AA14(13,-20) AA15(14,-20) AA16(15,-20) AA17(16,-20) AA18(17,-20) AA19(18,-20) AA20(19,-20) AA21(20,-20) AA22(21,-20) AB1(0,-21) AB2(1,-21) AB3(2,-21) AB4(3,-21) AB5(4,-21) AB6(5,-21) AB7(6,-21) AB8(7,-21) AB9(8,-21) AB10(9,-21) AB11(10,-21) AB12(11,-21) AB13(12,-21) AB14(13,-21) AB15(14,-21) AB16(15,-21) AB17(16,-21) AB18(17,-21) AB19(18,-21) AB20(19,-21) AB21(20,-21) AB22(21,-21) B1(0,-1) B2(1,-1) B3(2,-1) B4(3,-1) B5(4,-1) B6(5,-1) B7(6,-1) B8(7,-1) B9(8,-1) B10(9,-1) B11(10,-1) B12(11,-1) B13(12,-1) B14(13,-1) B15(14,-1) B16(15,-1) B17(16,-1) B18(17,-1) B19(18,-1) B20(19,-1) B21(20,-1) B22(21,-1) C1(0,-2) C2(1,-2) C3(2,-2) C4(3,-2) C5(4,-2) C6(5,-2) C7(6,-2) C8(7,-2) C9(8,-2) C10(9,-2) C11(10,-2) C12(11,-2) C13(12,-2) C14(13,-2) C15(14,-2) C16(15,-2) C17(16,-2) C18(17,-2) C19(18,-2) C20(19,-2) C21(20,-2) C22(21,-2) D1(0,-3) D2(1,-3) D3(2,-3) D4(3,-3) D5(4,-3) D6(5,-3) D7(6,-3) D8(7,-3) D9(8,-3) D10(9,-3) D11(10,-3) D12(11,-3) D13(12,-3) D14(13,-3) D15(14,-3) D16(15,-3) D17(16,-3) D18(17,-3) D19(18,-3) D20(19,-3) D21(20,-3) D22(21,-3) E1(0,-4) E2(1,-4) E3(2,-4) E4(3,-4) E5(4,-4) E6(5,-4) E7(6,-4) E8(7,-4) E9(8,-4) E10(9,-4) E11(10,-4) E12(11,-4) E13(12,-4) E14(13,-4) E15(14,-4) E16(15,-4) E17(16,-4) E18(17,-4) E19(18,-4) E20(19,-4) E21(20,-4) E22(21,-4) F1(0,-5) F2(1,-5) F3(2,-5) F4(3,-5) F5(4,-5) F6(5,-5) F7(6,-5) F8(7,-5) F9(8,-5) F10(9,-5) F11(10,-5) F12(11,-5) F13(12,-5) F14(13,-5) F15(14,-5) F16(15,-5) F17(16,-5) F18(17,-5) F19(18,-5) F20(19,-5) F21(20,-5) F22(21,-5) G1(0,-6) G2(1,-6) G3(2,-6) G4(3,-6) G5(4,-6) G6(5,-6) G7(6,-6) G8(7,-6) G9(8,-6) G10(9,-6) G11(10,-6) G12(11,-6) G13(12,-6) G14(13,-6) G15(14,-6) G16(15,-6) G17(16,-6) G18(17,-6) G19(18,-6) G20(19,-6) G21(20,-6) G22(21,-6) H1(0,-7) H2(1,-7) H3(2,-7) H4(3,-7) H5(4,-7) H6(5,-7) H7(6,-7) H8(7,-7) H9(8,-7) H10(9,-7) H11(10,-7) H12(11,-7) H13(12,-7) H14(13,-7) H15(14,-7) H16(15,-7) H17(16,-7) H18(17,-7) H19(18,-7) H20(19,-7) H21(20,-7) H22(21,-7) J1(0,-8) J2(1,-8) J3(2,-8) J4(3,-8) J5(4,-8) J6(5,-8) J7(6,-8) J8(7,-8) J9(8,-8) J10(9,-8) J11(10,-8) J12(11,-8) J13(12,-8) J14(13,-8) J15(14,-8) J16(15,-8) J17(16,-8) J18(17,-8) J19(18,-8) J20(19,-8) J21(20,-8) J22(21,-8) K1(0,-9) K2(1,-9) K3(2,-9) K4(3,-9) K5(4,-9) K6(5,-9) K7(6,-9) K8(7,-9) K9(8,-9) K10(9,-9) K11(10,-9) K12(11,-9) K13(12,-9) K14(13,-9) K15(14,-9) K16(15,-9) K17(16,-9) K18(17,-9) K19(18,-9) K20(19,-9) K21(20,-9) K22(21,-9) L1(0,-10) L2(1,-10) L3(2,-10) L4(3,-10) L5(4,-10) L6(5,-10) L7(6,-10) L8(7,-10) L9(8,-10) L10(9,-10) L11(10,-10) L12(11,-10) L13(12,-10) L14(13,-10) L15(14,-10) L16(15,-10) L17(16,-10) L18(17,-10) L19(18,-10) L20(19,-10) L21(20,-10) L22(21,-10) M1(0,-11) M2(1,-11) M3(2,-11) M4(3,-11) M5(4,-11) M6(5,-11) M7(6,-11) M8(7,-11) M9(8,-11) M10(9,-11) M11(10,-11) M12(11,-11) M13(12,-11) M14(13,-11) M15(14,-11) M16(15,-11) M17(16,-11) M18(17,-11) M19(18,-11) M20(19,-11) M21(20,-11) M22(21,-11) N1(0,-12) N2(1,-12) N3(2,-12) N4(3,-12) N5(4,-12) N6(5,-12) N7(6,-12) N8(7,-12) N9(8,-12) N10(9,-12) N11(10,-12) N12(11,-12) N13(12,-12) N14(13,-12) N15(14,-12) N16(15,-12) N17(16,-12) N18(17,-12) N19(18,-12) N20(19,-12) N21(20,-12) N22(21,-12) P1(0,-13) P2(1,-13) P3(2,-13) P4(3,-13) P5(4,-13) P6(5,-13) P7(6,-13) P8(7,-13) P9(8,-13) P10(9,-13) P11(10,-13) P12(11,-13) P13(12,-13) P14(13,-13) P15(14,-13) P16(15,-13) P17(16,-13) P18(17,-13) P19(18,-13) P20(19,-13) P21(20,-13) P22(21,-13) R1(0,-14) R2(1,-14) R3(2,-14) R4(3,-14) R5(4,-14) R6(5,-14) R7(6,-14) R8(7,-14) R9(8,-14) R10(9,-14) R11(10,-14) R12(11,-14) R13(12,-14) R14(13,-14) R15(14,-14) R16(15,-14) R17(16,-14) R18(17,-14) R19(18,-14) R20(19,-14) R21(20,-14) R22(21,-14) T1(0,-15) T2(1,-15) T3(2,-15) T4(3,-15) T5(4,-15) T6(5,-15) T7(6,-15) T8(7,-15) T9(8,-15) T10(9,-15) T11(10,-15) T12(11,-15) T13(12,-15) T14(13,-15) T15(14,-15) T16(15,-15) T17(16,-15) T18(17,-15) T19(18,-15) T20(19,-15) T21(20,-15) T22(21,-15) U1(0,-16) U2(1,-16) U3(2,-16) U4(3,-16) U5(4,-16) U6(5,-16) U7(6,-16) U8(7,-16) U9(8,-16) U10(9,-16) U11(10,-16) U12(11,-16) U13(12,-16) U14(13,-16) U15(14,-16) U16(15,-16) U17(16,-16) U18(17,-16) U19(18,-16) U20(19,-16) U21(20,-16) U22(21,-16) V1(0,-17) V2(1,-17) V3(2,-17) V4(3,-17) V5(4,-17) V6(5,-17) V7(6,-17) V8(7,-17) V9(8,-17) V10(9,-17) V11(10,-17) V12(11,-17) V13(12,-17) V14(13,-17) V15(14,-17) V16(15,-17) V17(16,-17) V18(17,-17) V19(18,-17) V20(19,-17) V21(20,-17) V22(21,-17) W1(0,-18) W2(1,-18) W3(2,-18) W4(3,-18) W5(4,-18) W6(5,-18) W7(6,-18) W8(7,-18) W9(8,-18) W10(9,-18) W11(10,-18) W12(11,-18) W13(12,-18) W14(13,-18) W15(14,-18) W16(15,-18) W17(16,-18) W18(17,-18) W19(18,-18) W20(19,-18) W21(20,-18) W22(21,-18) Y1(0,-19) Y2(1,-19) Y3(2,-19) Y4(3,-19) Y5(4,-19) Y6(5,-19) Y7(6,-19) Y8(7,-19) Y9(8,-19) Y10(9,-19) Y11(10,-19) Y12(11,-19) Y13(12,-19) Y14(13,-19) Y15(14,-19) Y16(15,-19) Y17(16,-19) Y18(17,-19) Y19(18,-19) Y20(19,-19) Y21(20,-19) Y22(21,-19)
  silkscreen extent -1.3,-22.3 22.3,1.3
CC0805 [mil]
  rect 60x56 smd: 1(0,0) 2(87.5,0)
  silkscreen extent -38,-38 125,38
CC0805-MM [mil]
  rect 60x56 smd: 1(0,0) 2(86.61,0)
  silkscreen extent -39,-35 126,35
CC1206 [mil]
  rect 64x64 smd: 1(0,0) 2(131.25,0)
  silkscreen extent -44,-44 175,44
CC1206-MM [mil]
  rect 64x64 smd: 1(0,0) 2(129.92,0)
  silkscreen extent -39,-43 169,43
CONN1X1M [mm]
  round 3.81 hole 1.3: 1(0,0)
  silkscreen extent -2.13,-2.13 2.13,2.13